# Allegro board arena_12-12_v6.brd
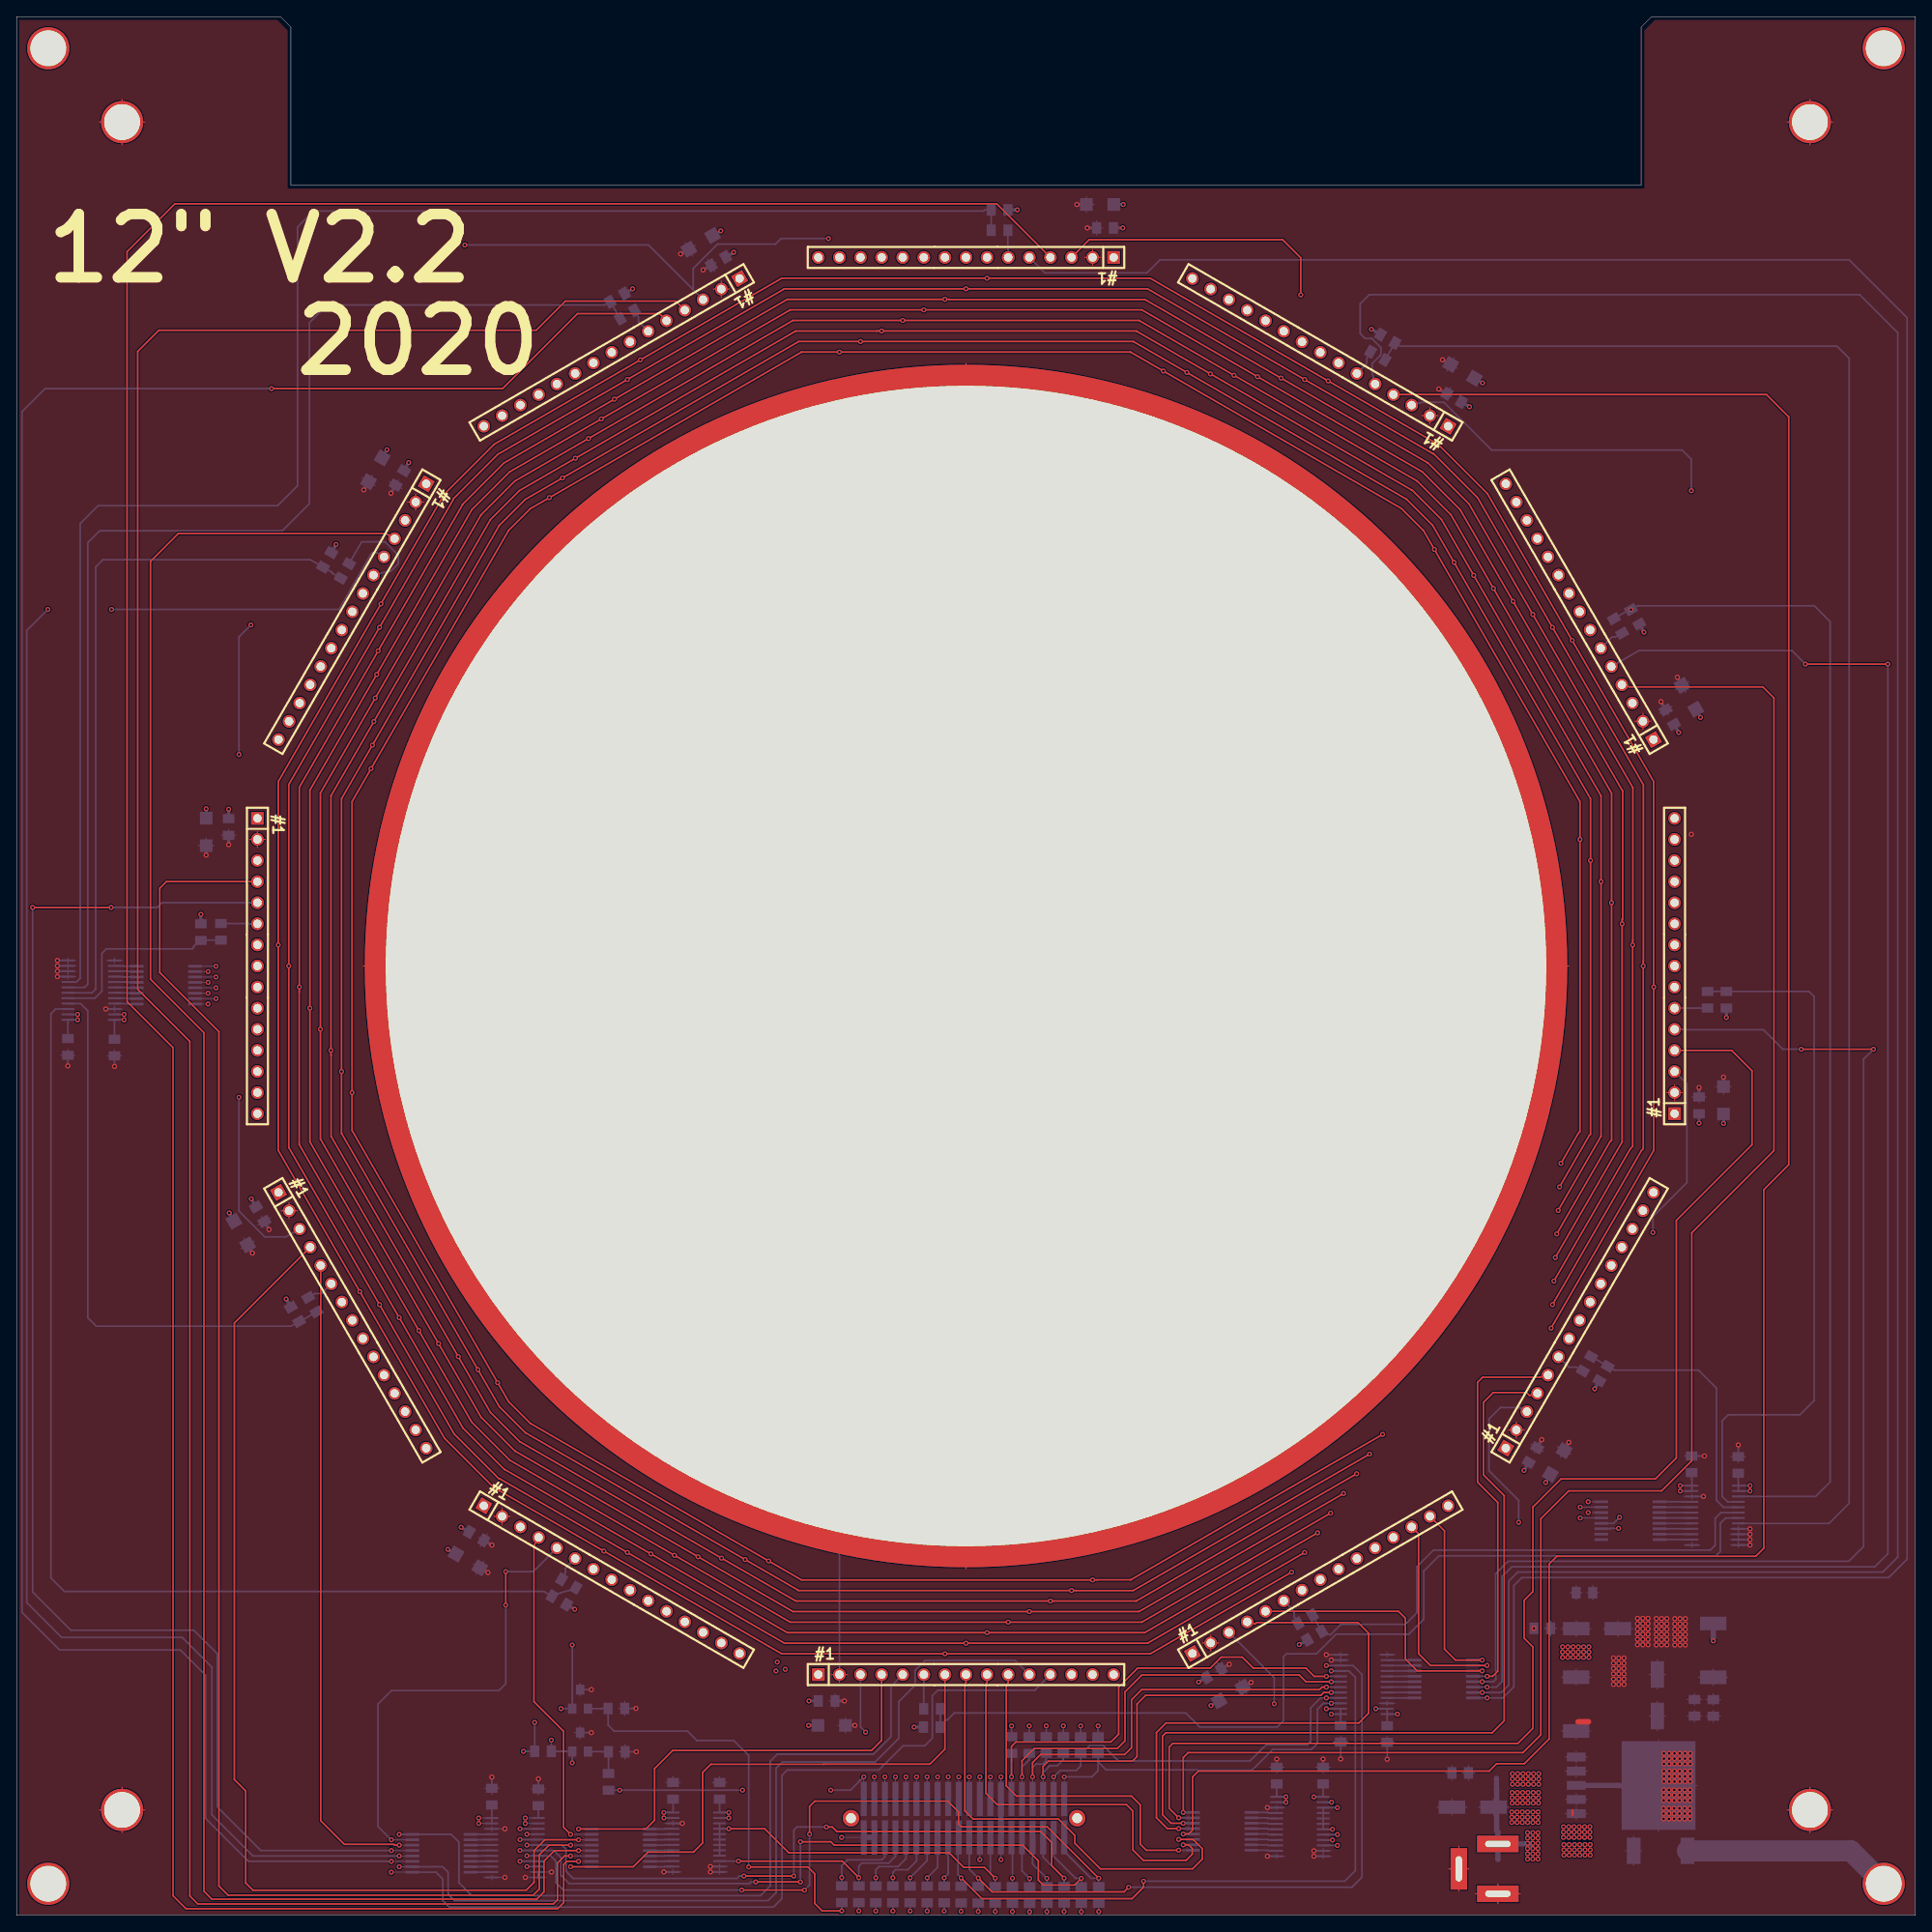
[diagram p0: board, top side]
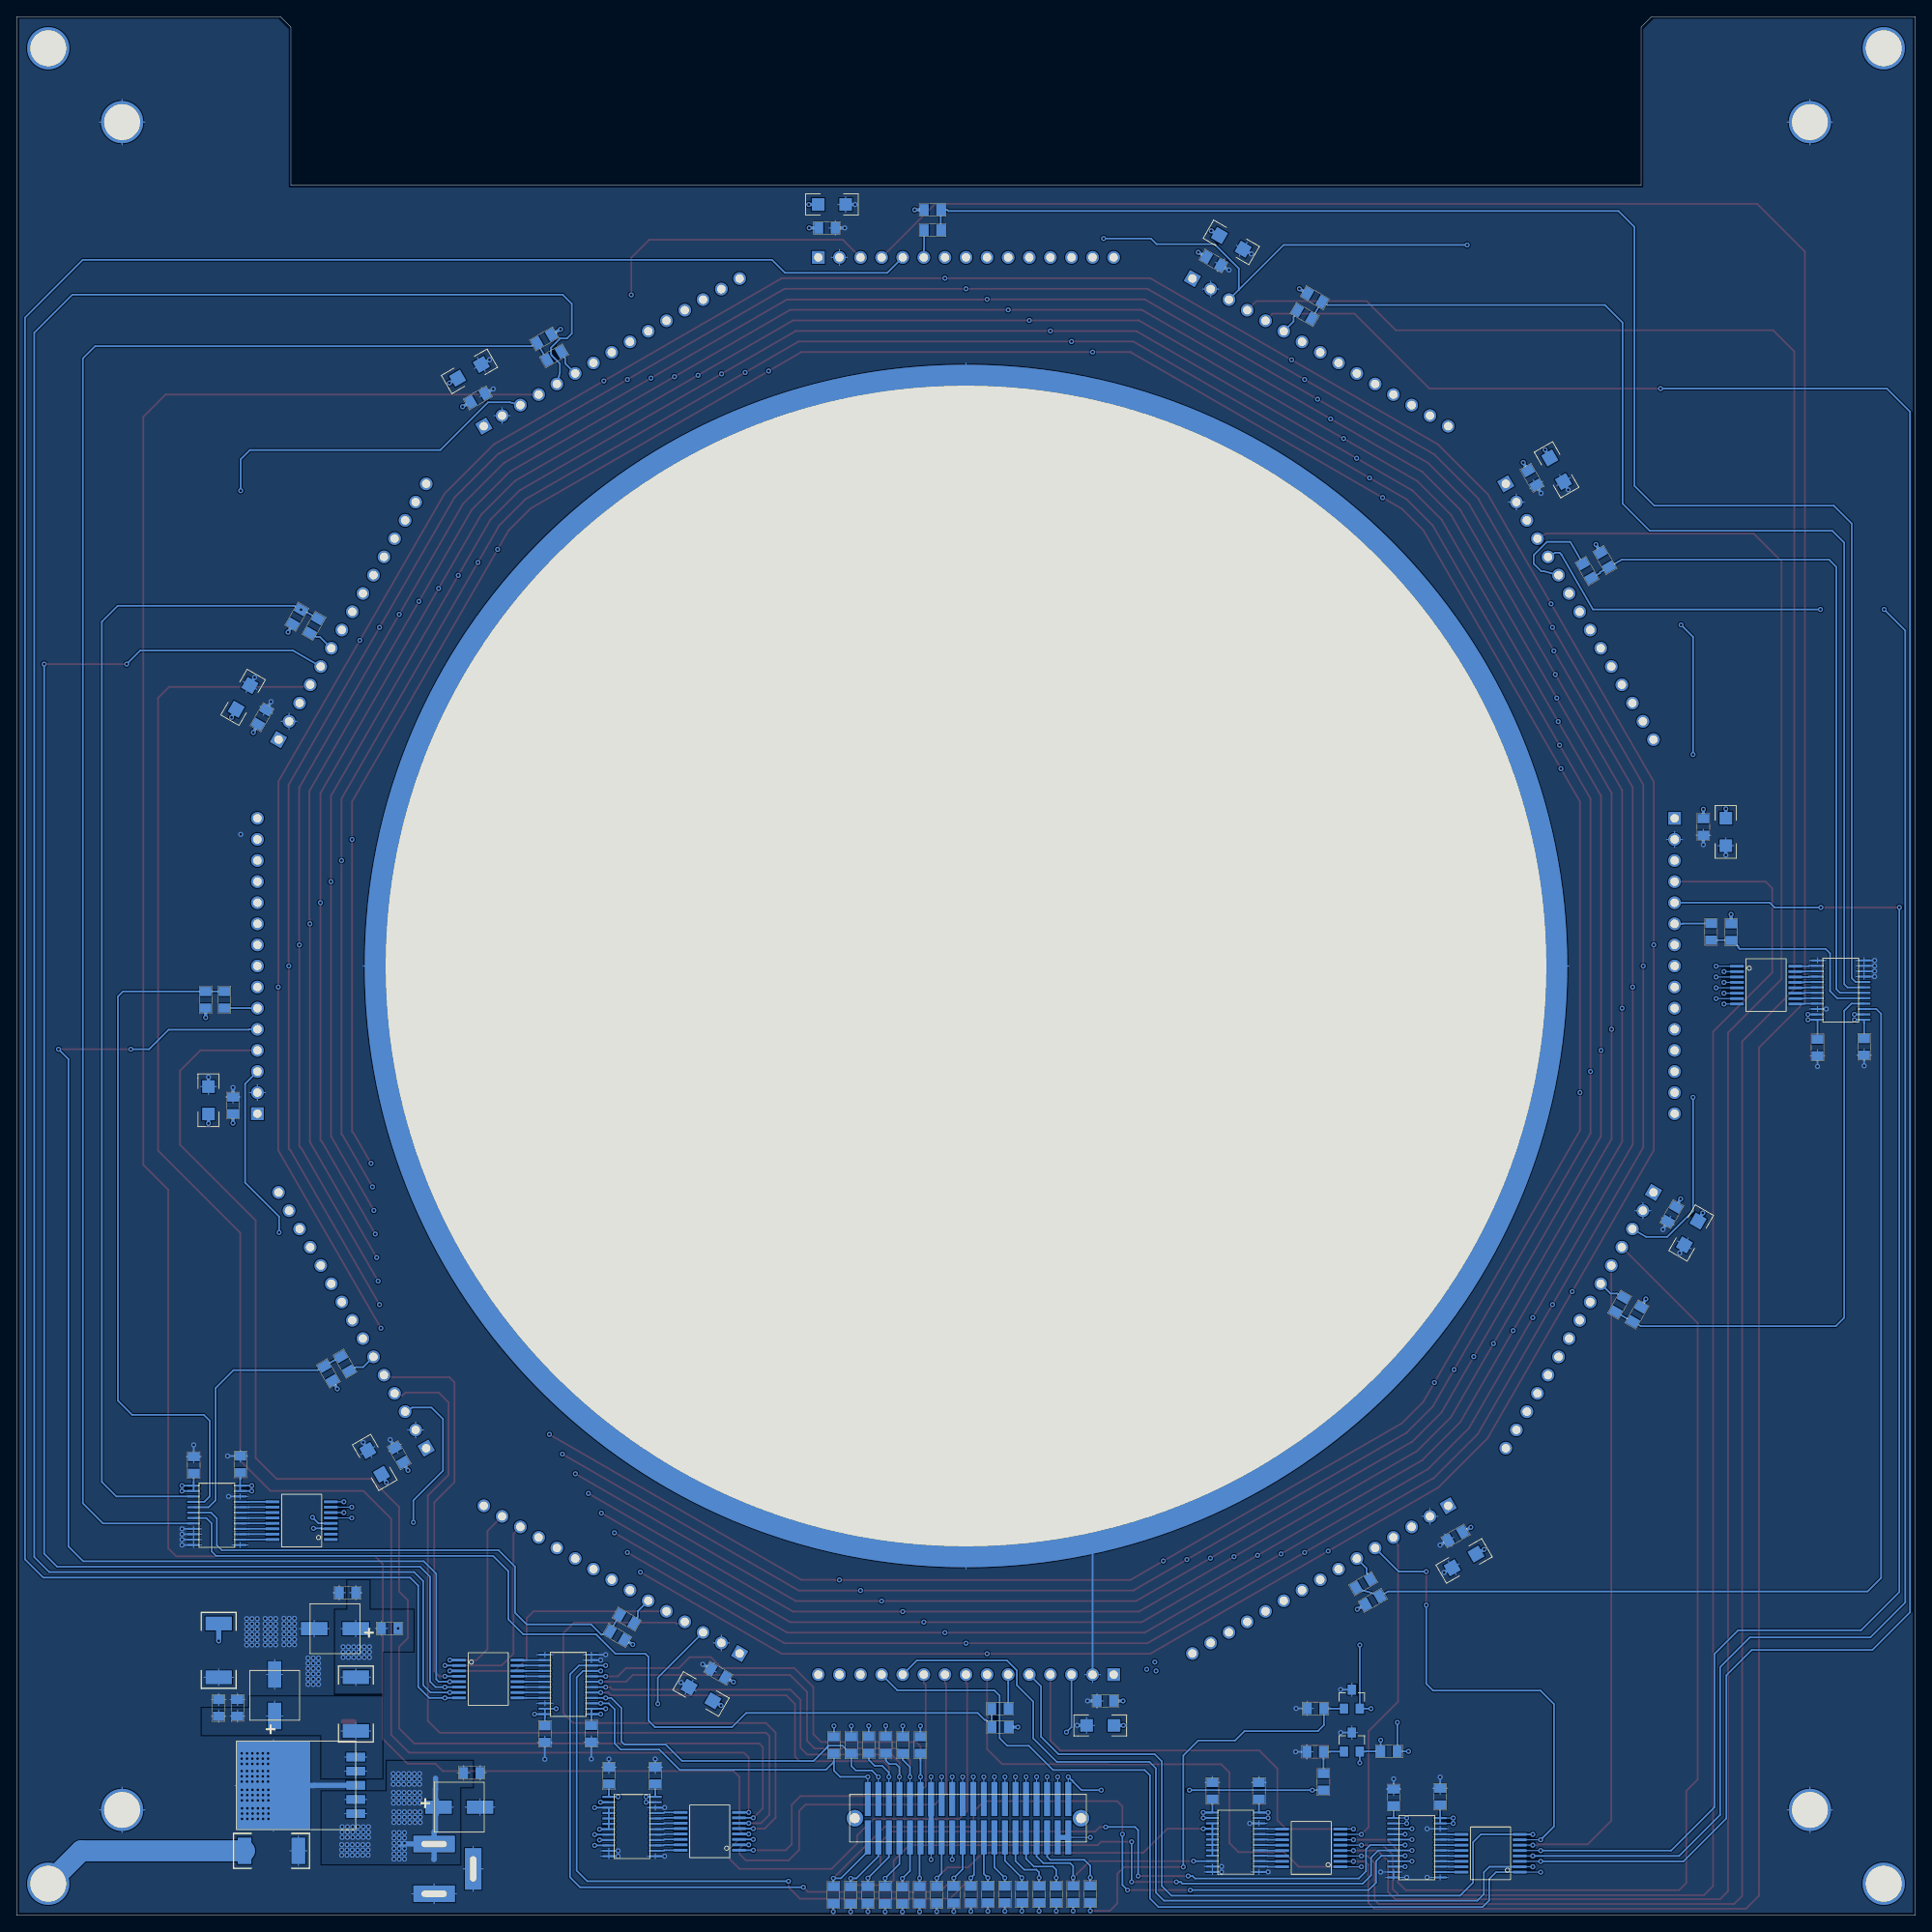
[diagram p1: board, bottom side, seen from below]

Outline 228.6 x 228.6 mm; copper layers: TOP, PWR, LAYER 1, GND2, LAYER 2, BOTTOM. Coordinates in mm from the lower left corner of the outline.
Outline path: 0,228.6 0,0 228.6,0 228.6,228.6 196.85,228.6 195.58,227.33 195.58,208.28 33.02,208.28 33.02,227.33 31.75,228.6 0,228.6

## Design rules (mm)
constraint set DEFAULT: min track width 0.127

## Placement (name value [footprint] x y rotation side)
C1  10uF  [1206]  82.36 201.42 210 bottom
C2  10uF  [1206]  130.44 205.98 180 bottom
C3  0.1uF  [EIA0805]  173.06 182.7 150 bottom
C4  10uF  [1206]  174.08 185.89 150 bottom
C5  0.1uF  [EIA0805]  131.04 203.16 180 bottom
C6  0.1uF  [EIA0805]  84.49 199.16 210 bottom
C7  0.1uF  [0805]  46.14 173.06 240 bottom
C8  10uF  [1206]  43.19 174.04 240 bottom
C9  10uF  [1206]  205.5 98.13 90 bottom
C10  0.1uF  [EIA0805]  202.55 97.52 90 bottom
C11  10uF  [1206]  22.82 130.44 270 bottom
C12  0.1uF  [EIA0805]  25.53 131.04 270 bottom
C13  10uF  [1206]  185.48 54.53 60 bottom
C14  0.1uF  [EIA0805]  182.55 55.42 60 bottom
C15  10uF  [1206]  54.33 42.67 330 bottom
C16  0.1uF  [EIA0805]  55.37 45.66 330 bottom
C17  10uF  [1206]  146.2 26.66 30 bottom
C18  0.1uF  [EIA0805]  144.14 29.16 30 bottom
C19  0.1uF  [EIA0805]  97.52 25.82 0 bottom
C20  10uF  [1206]  98.13 22.87 0 bottom
C21  10uF  [1206]  26.99 82.16 300 bottom
C22  0.1uF  [EIA0805]  29.32 84.42 300 bottom
C23  10uF  [1206]  201.33 146.65 120 bottom
C24  0.1uF  [EIA0805]  199.03 144.27 120 bottom
C25  0.1uF  [EIA0805]  62.81 14.21 90 bottom
C26  0.1uF  [EIA0805]  151.71 16.83 90 bottom
C27  0.1uF  [EIA0805]  157.29 16.83 90 bottom
C28  0.1uF  [EIA0805]  57.21 14.3 90 bottom
C29  0.1uF  [EIA0805]  11.79 104.48 270 bottom
C30  0.1uF  [EIA0805]  6.17 104.56 270 bottom
C31  0.1uF  [EIA0805]  159.41 21.87 270 bottom
C32  0.1uF  [EIA0805]  165.01 21.83 270 bottom
C33  0.1uF  [EIA0805]  84.63 15 90 bottom
C34  0.1uF  [EIA0805]  79.03 15 90 bottom
C35  0.1uF  [EIA0805]  201.66 54.31 90 bottom
C36  0.1uF  [EIA0805]  207.28 54.23 90 bottom
C37  0.1uF  [EIA0805]  173.8 17.16 180 bottom
C38  10uF  [AL_CAP_D]  177.81 13.03 180 bottom
C39  10uF/6.3/Elec  [AL_CAP_D]  197.54 24 90 bottom
C40  0.001uF/X5R  [EIA0805]  204.27 24.98 90 bottom
C41  0.1uF/X5R  [EIA0805]  202.01 24.99 90 bottom
C42  2.2uF/60/Elec  [AL_CAP_D]  187.77 34.52 0 bottom
C43  0.01uF/X5R  [EIA0805]  183.68 34.56 180 bottom
C44  0.1uF/X5R  [EIA0805]  188.76 38.85 0 bottom
J1  CONN15  [HDR-1X15]  56.25 49.31 330 top
J2  CONN15  [HDR-1X15]  179.29 56.25 60 top
J3  CONN15  [HDR-1X15]  197.07 141.56 120 top
J4  CONN15  [HDR-1X15]  96.52 28.99 0 top
J5  CONN15  [HDR-1X15]  28.99 132.08 270 top
J6  CONN15  [HDR-1X15]  87.04 197.07 210 top
J7  CONN15  [HDR-1X15]  172.35 179.29 150 top
J8  CONN15  [HDR-1X15]  141.56 31.53 30 top
J9  CONN15  [HDR-1X15]  199.61 96.52 90 top
J10  CONN15  [HDR-1X15]  31.53 87.04 300 top
J17  CONN15  [HDR-1X15]  49.31 172.35 240 top
J19  CONN15  [HDR-1X15]  132.08 199.61 180 top
J25  A35051-ND (68pin, 1.27mm pitch, Through hold, A113405-ND)  [SMV_2X20]  101.99 14.01 270 bottom
J26  CP-102A-ND  [PJ102A]  178.33 5.6 0 bottom
L1  Ferrite Bead/5-15Ohm  [EIA2512]  197.92 7.77 0 bottom
L2  Ferrite Bead/5-15Ohm  [EIA2512]  204.27 31.9 270 bottom
L3  Ferrite Bead/5-15Ohm  [EIA2512]  187.76 25.44 90 bottom
M1  TEST POINT  [8-32]  224.79 3.81 0 top
M2  TEST POINT  [8-32]  3.81 3.81 0 top
M3  TEST POINT  [8-32]  215.9 12.7 0 top
M4  TEST POINT  [8-32]  12.7 12.7 0 top
M5  TEST POINT  [8-32]  215.9 215.9 0 top
M6  TEST POINT  [8-32]  12.7 215.9 0 top
M7  TEST POINT  [8-32]  3.81 224.79 0 top
M8  TEST POINT  [8-32]  224.79 224.79 0 top
M9  TEST POINT  [1-32]  114.3 114.3 0 top
NOREF  -  []  0 228.6 0 top
NOREF#2  -  []  228.6 0 90 top
NOREF#3  -  []  135.59 180.83 0 top
Q1  MTD4P06  [SOT-23]  67.84 26.03 180 bottom
Q3  MTD4P06  [SOT-23]  67.84 20.87 180 bottom
R1  27  [EIA0805]  110.21 24.87 180 bottom
R2  27  [EIA0805]  66.47 39.95 150 bottom
R3  27  [EIA0805]  35.61 73.53 120 bottom
R4  27  [EIA0805]  24.6 118.41 90 bottom
R5  27  [EIA0805]  39.52 161.86 60 bottom
R6  27  [EIA0805]  73.53 192.74 30 bottom
R7  27  [EIA0805]  118.34 202.88 0 bottom
R8  27  [EIA0805]  163.88 187.76 150 bottom
R9  27  [EIA0805]  192.8 155.24 300 bottom
R10  27  [EIA0805]  203.58 110.24 270 bottom
R11  27  [EIA0805]  189.06 66.41 240 bottom
R12  27  [EIA0805]  155.14 35.66 210 bottom
R13  200  [EIA0805]  99.34 2.55 270 bottom
R14  20K  [EIA0805]  72.21 24.92 180 bottom
R17  200  [EIA0805]  71.26 16.08 90 bottom
R18  20K  [EIA0805]  72.26 19.7 180 bottom
R19  4.7K  [EIA0805]  117.82 2.48 270 bottom
R20  4.7K  [EIA0805]  63.37 19.75 0 bottom
R21  4.7K  [EIA0805]  111.67 2.51 270 bottom
R22  4.7K  [EIA0805]  109.63 2.51 270 bottom
R23  4.7K  [EIA0805]  119.79 20.51 90 bottom
R24  4.7K  [EIA0805]  121.91 20.51 90 bottom
R25  4.7K  [EIA0805]  126.11 2.48 270 bottom
R26  4.7K  [EIA0805]  124.04 2.45 270 bottom
R27  4.7K  [EIA0805]  121.96 2.44 270 bottom
R28  4.7K  [EIA0805]  119.89 2.46 270 bottom
R29  4.7K  [EIA0805]  115.77 2.49 270 bottom
R30  4.7K  [EIA0805]  113.72 2.5 270 bottom
R31  4.7K  [EIA0805]  130.28 2.46 270 bottom
R32  4.7K  [EIA0805]  128.18 2.45 270 bottom
R33  4.7K  [EIA0805]  123.96 20.52 90 bottom
R34  4.7K  [EIA0805]  126.02 20.52 90 bottom
R35  4.7K  [EIA0805]  128.1 20.51 90 bottom
R36  4.7K  [EIA0805]  130.2 20.51 90 bottom
R37  4.7K  [EIA0805]  165.07 189.81 150 bottom
R38  4.7K  [EIA0805]  118.34 205.33 0 bottom
R39  4.7K  [EIA0805]  72.31 194.77 30 bottom
R40  4.7K  [EIA0805]  37.39 163.19 60 bottom
R41  4.7K  [EIA0805]  22.19 118.38 90 bottom
R42  4.7K  [EIA0805]  33.52 72.36 120 bottom
R43  4.7K  [EIA0805]  65.34 37.92 330 bottom
R44  4.7K  [EIA0805]  110.19 22.67 180 bottom
R49  4.7K  [EIA0805]  156.27 33.68 210 bottom
R50  4.7K  [EIA0805]  191.06 65.24 240 bottom
R51  4.7K  [EIA0805]  205.84 110.24 270 bottom
R52  4.7K  [EIA0805]  194.86 156.34 300 bottom
R57  4.7K  [EIA0805]  107.57 2.53 270 bottom
R58  4.7K  [EIA0805]  105.5 2.53 270 bottom
R59  4.7K  [EIA0805]  103.44 2.53 270 bottom
R60  4.7K  [EIA0805]  101.4 2.54 270 bottom
RN1  20  [SSOP16]  51.14 7.48 0 bottom
RN2  20  [SSOP16]  72.73 8.13 0 bottom
RN3  20  [SSOP16]  17.97 112 180 bottom
RN4  20  [SSOP16]  171.82 28.46 180 bottom
RN5  20  [SSOP16]  145.15 10.12 0 bottom
RN6  20  [SSOP16]  194.28 47.52 0 bottom
U1  SN74LVC8T245  [TSSOP24]  62.81 11.72 180 bottom
U2  SN74LVC8T245  [TSSOP24]  6.18 107.82 0 bottom
U3  SN74LVC8T245  [TSSOP24]  84.63 12.38 180 bottom
U4  SN74LVC8T245  [TSSOP24]  159.4 24.23 0 bottom
U5  SN74LVC8T245  [TSSOP24]  157.3 14.27 180 bottom
U6  SN74LVC8T245  [TSSOP24]  207.29 51.74 180 bottom
U7  LT1764  [DD5]  187.77 12.26 0 bottom

## Library data of the parts
C1 C2 C4 C8 C9 C11 C13 C15 C17 C20 C21 C23 C38 = CAPACITOR POL
C3 C5-C7 C10 C12 C14 C16 C18 C19 C22 C24-C37 = CAPACITOR NON-POL
C39 C42 = CAPACITOR
C40 C41 C43 C44 = CAP NP
J1-J10 J17 J19 = CONN RECT 15_7
J25 = HEADER 34x2_1
J26 = HEADER 3
L1-L3 = BEADARR_4
M1-M9 = TEST POINT
Q1 Q3 = MTD4P06
R1-R14 R17-R44 R49-R52 R57-R60 = RESISTOR
RN1-RN6 = RESNW_IS_8
U1-U6 = SN7474LVC8T245
U7 = LT1764

## Footprints (pads in the part's own frame, mm; a bottom-side part is the same pattern mirrored in y, then rotated)
1-32
  round 144.78 hole 139.7: 1(0,0)
8-32
  round 5.08 hole 4.305: 1(0,0)
0805
  rect 1.1x1.4 smd: 1(-1.001,0) 2(1.001,0)
1206
  rect 1.524x1.524 smd: 1(-1.651,0) 2(1.651,0)
AL_CAP_D
  rect 3.2x1.6 smd: 1(0,0) 2(5.001,0)
DD5
  rect 2.286x1.067 smd: 1(0,0) 2(0,-1.702) 3(0,-3.404) 4(0,-5.105) 5(0,-6.807)
  rect 8.89x10.668 smd: 6(9.906,-3.378)
EIA0805
  rect 1.1x1.4 smd: 1(-1.001,0) 2(1.001,0)
EIA2512
  rect 1.651x3.175 smd: 1(-3.239,0) 2(3.239,0)
HDR-1X15
  rect 1.524x1.524 hole 1.016: 1(0,0)
  round 1.524 hole 1.016: 2(2.54,0) 3(5.08,0) 4(7.62,0) 5(10.16,0) 6(12.7,0) 7(15.24,0) 8(17.78,0) 9(20.32,0) 10(22.86,0) 11(25.4,0) 12(27.94,0) 13(30.48,0) 14(33.02,0) 15(35.56,0)
PJ102A
  rect 5.001x1.999 hole 3.051x0.759: 1(0,-3) 2(0,3)
  rect 1.999x5.001 hole 0.759x3.051: 3(-4.699,0)
SMV_2X20
  round 1.999 hole 1.191 unplated: (2.309,-25.69) (2.309,1.539)
  rect 4.11x0.729 smd: 1(0,0) 2(0,-1.27) 3(0,-2.54) 4(0,-3.81) 5(0,-5.08) 6(0,-6.35) 7(0,-7.62) 8(0,-8.89) 9(0,-10.16) 10(0,-11.43) 11(0,-12.7) 12(0,-13.97) 13(0,-15.24) 14(0,-16.51) 15(0,-17.78) 16(0,-19.05) 17(0,-20.32) 18(0,-21.59) 19(0,-22.86) 20(0,-24.13) 21(4.62,-24.13) 22(4.62,-22.86) 23(4.62,-21.59) 24(4.62,-20.32) 25(4.62,-19.05) 26(4.62,-17.78) 27(4.62,-16.51) 28(4.62,-15.24) 29(4.62,-13.97) 30(4.62,-12.7) 31(4.62,-11.43) 32(4.62,-10.16) 33(4.62,-8.89) 34(4.62,-7.62) 35(4.62,-6.35) 36(4.62,-5.08) 37(4.62,-3.81) 38(4.62,-2.54) 39(4.62,-1.27) 40(4.62,0)
SOT-23
  rect 1.016x1.219 smd: 1(-0.953,-1.143) 2(0.953,-1.143) 3(0,1.143)
SSOP16
  rect 1.651x0.33 smd: 1(-3.505,2.276) 2(-3.505,1.626) 3(-3.505,0.975) 4(-3.505,0.325) 5(-3.505,-0.325) 6(-3.505,-0.975) 7(-3.505,-1.626) 8(-3.505,-2.276) 9(3.505,-2.276) 10(3.505,-1.626) 11(3.505,-0.975) 12(3.505,-0.325) 13(3.505,0.325) 14(3.505,0.975) 15(3.505,1.626) 16(3.505,2.276)
TSSOP24
  rect 1.549x0.249 smd: 1(0,0) 2(0,-0.65) 3(0,-1.3) 4(0,-1.951) 5(0,-2.601) 6(0,-3.251) 7(0,-3.899) 8(0,-4.549) 9(0,-5.199) 10(0,-5.85) 11(0,-6.5) 12(0,-7.15) 13(5.601,-7.15) 14(5.601,-6.5) 15(5.601,-5.85) 16(5.601,-5.199) 17(5.601,-4.549) 18(5.601,-3.899) 19(5.601,-3.251) 20(5.601,-2.601) 21(5.601,-1.951) 22(5.601,-1.3) 23(5.601,-0.65) 24(5.601,0)

## Nets
3.3VDC: C25.1 C27.1 C29.1 C31.1 C33.1 C35.1 C42.1 C43.1 C44.1 L3.2 R19.2 R21.2 R22.2 R23.2 R24.2 R25.2 R26.2 R27.2 R28.2 R29.2 R30.2 R31.2 R32.2 R33.2 R34.2 R35.2 R36.2 R57.2 R58.2 R59.2 R60.2 U1.1 U1.2 U2.23 U2.24 U3.1 U3.2 U4.1 U4.2 U5.1 U5.2 U6.23 U6.24
5VDC: C1.1 C2.1 C3.1 C4.1 C5.1 C6.1 C7.1 C8.1 C9.1 C10.1 C11.1 C12.1 C13.1 C14.1 C15.1 C16.1 C17.1 C18.1 C19.1 C20.1 C21.1 C22.1 C23.1 C24.1 C26.1 C28.1 C30.1 C32.1 C34.1 C36.1 C37.1 C38.1 J1.1 J2.1 J3.1 J4.1 J5.1 J6.1 J7.1 J8.1 J9.1 J10.1 J17.1 J19.1 J26.1 R20.1 R37.2 R38.2 R39.2 R40.2 R41.2 R42.2 R43.2 R44.2 R49.2 R50.2 R51.2 R52.2 U1.23 U1.24 U2.1 U2.2 U3.23 U3.24 U4.23 U4.24 U5.23 U5.24 U6.1 U6.2 U7.1 U7.2
GND: C1.2 C2.2 C3.2 C4.2 C5.2 C6.2 C7.2 C8.2 C9.2 C10.2 C11.2 C12.2 C13.2 C14.2 C15.2 C16.2 C17.2 C18.2 C19.2 C20.2 C21.2 C22.2 C23.2 C24.2 C25.2 C26.2 C27.2 C28.2 C29.2 C30.2 C31.2 C32.2 C33.2 C34.2 C35.2 C36.2 C37.2 C38.2 C39.2 C40.2 C41.2 C42.2 C43.2 C44.2 J1.2 J2.2 J3.2 J4.2 J5.2 J6.2 J7.2 J8.2 J9.2 J10.2 J17.2 J19.2 J26.2 J26.3 L1.1 L2.2 M3.1 M4.1 M5.1 M6.1 M9.1 Q1.3(S) Q3.3(S) R14.1 R18.1 U1.11 U1.12 U1.13 U1.22(\\O\E\) U2.9 U2.10 U2.11 U2.12 U2.13 U2.22(\\O\E\) U3.11 U3.12 U3.13 U3.22(\\O\E\) U4.11 U4.12 U4.13 U4.22(\\O\E\) U5.11 U5.12 U5.13 U5.22(\\O\E\) U6.9 U6.10 U6.11 U6.12 U6.13 U6.22(\\O\E\) U7.3 U7.6
GND_SIGNAL: J25.14 J25.27 J25.29 J25.39 J25.40 L2.1
CS0: J1.7 J2.7 J3.7 J4.7 J5.7 J6.7 J7.7 J8.7 J9.7 J10.7 J17.7 J19.7 RN2.1
CS1: J1.8 J2.8 J3.8 J4.8 J5.8 J6.8 J7.8 J8.8 J9.8 J10.8 J17.8 J19.8 RN5.3
CS2: J1.9 J2.9 J3.9 J4.9 J5.9 J6.9 J7.9 J8.9 J9.9 J10.9 J17.9 J19.9 RN5.2
CS3: J1.10 J2.10 J3.10 J4.10 J5.10 J6.10 J7.10 J8.10 J9.10 J10.10 J17.10 J19.10 RN5.1
CS4: J1.11 J2.11 J3.11 J4.11 J5.11 J6.11 J7.11 J8.11 J9.11 J10.11 J17.11 J19.11 RN1.2
CS5: J1.12 J2.12 J3.12 J4.12 J5.12 J6.12 J7.12 J8.12 J9.12 J10.12 J17.12 J19.12 RN1.1
CS6: J1.13 J2.13 J3.13 J4.13 J5.13 J6.13 J7.13 J8.13 J9.13 J10.13 J17.13 J19.13 RN4.2
CS7: J1.14 J2.14 J3.14 J4.14 J5.14 J6.14 J7.14 J8.14 J9.14 J10.14 J17.14 J19.14 RN4.1
CS_IN_0: J25.37 R60.1 U3.10
CS_IN_1: J25.36 R59.1 U5.8
CS_IN_2: J25.35 R58.1 U5.9
CS_IN_3: J25.34 R57.1 U5.10
CS_IN_4: J25.33 R22.1 U1.9
CS_IN_5: J25.32 R21.1 U1.10
CS_IN_6: J25.31 R30.1 U4.9
CS_IN_7: J25.30 R29.1 U4.10
EXT_INT: J1.15 J2.15 J3.15 J4.15 J5.15 J6.15 J7.15 J8.15 J9.15 J10.15 J17.15 J19.15 Q3.2 R20.2
EXT_INT_IN: J25.1 R17.1
MISO_0: R1.1 R44.1 U6.7
MISO_1: R2.1 R43.1 U2.3
MISO_2: R3.1 R42.1 U2.4
MISO_3: R4.1 R41.1 U2.5
MISO_4: R5.1 R40.1 U2.6
MISO_5: R6.1 R39.1 U2.7
MISO_6: R7.1 R38.1 U2.8
MISO_7: R8.1 R37.1 U6.8
MISO_8: R9.1 R52.1 U6.3
MISO_9: R10.1 R51.1 U6.4
MISO_10: R11.1 R50.1 U6.5
MISO_11: R12.1 R49.1 U6.6
MISO_OUT_0: J25.13 RN6.4
MISO_OUT_1: J25.12 RN3.8
MISO_OUT_2: J25.11 RN3.7
MISO_OUT_3: J25.10 RN3.6
MISO_OUT_4: J25.9 RN3.5
MISO_OUT_5: J25.8 RN3.4
MISO_OUT_6: J25.7 RN3.3
MISO_OUT_7: J25.6 RN6.3
MISO_OUT_8: J25.5 RN6.8
MISO_OUT_9: J25.4 RN6.7
MISO_OUT_10: J25.3 RN6.6
MISO_OUT_11: J25.2 RN6.5
MOSI_0: J4.5 RN1.8
MOSI_1: J1.5 RN1.7
MOSI_2: J10.5 RN1.6
MOSI_3: J5.5 RN1.5
MOSI_4: J17.5 RN1.4
MOSI_5: J6.5 RN1.3
MOSI_6: J19.5 RN4.8
MOSI_7: J7.5 RN4.7
MOSI_8: J3.5 RN4.6
MOSI_9: J9.5 RN4.5
MOSI_10: J2.5 RN4.4
MOSI_11: J8.5 RN4.3
MOSI_IN_0: J25.26 R28.1 U1.3
MOSI_IN_1: J25.25 R27.1 U1.4
MOSI_IN_2: J25.24 R26.1 U1.5
MOSI_IN_3: J25.23 R25.1 U1.6
MOSI_IN_4: J25.22 R32.1 U1.7
MOSI_IN_5: J25.21 R31.1 U1.8
MOSI_IN_6: J25.20 R36.1 U4.3
MOSI_IN_7: J25.19 R35.1 U4.4
MOSI_IN_8: J25.18 R34.1 U4.5
MOSI_IN_9: J25.17 R33.1 U4.6
MOSI_IN_10: J25.16 R24.1 U4.7
MOSI_IN_11: J25.15 R23.1 U4.8
RESET: J1.3 J2.3 J3.3 J4.3 J5.3 J6.3 J7.3 J8.3 J9.3 J10.3 J17.3 J19.3 Q1.2
RESET_IN: J25.38 R13.1
SCK_0: J4.4 RN2.8
SCK_1: J1.4 RN2.7
SCK_2: J10.4 RN2.6
SCK_3: J5.4 RN2.5
SCK_4: J17.4 RN2.4
SCK_5: J6.4 RN2.3
SCK_6: J19.4 RN2.2
SCK_7: J7.4 RN5.4
SCK_8: J3.4 RN5.8
SCK_9: J9.4 RN5.7
SCK_10: J2.4 RN5.6
SCK_11: J8.4 RN5.5
SCK_IN_0: J25.28 R19.1 U3.3 U3.4 U3.5 U3.6 U3.7 U3.8 U3.9 U5.3 U5.4 U5.5 U5.6 U5.7
N00182: J4.6 R1.2
N04213: J1.6 R2.2
N04860: J10.6 R3.2
N05048: J5.6 R4.2
N06135: J17.6 R5.2
N06323: J6.6 R6.2
N06511: J19.6 R7.2
N06699: J7.6 R8.2
N07866: J3.6 R9.2
N08054: J9.6 R10.2
N08430: J8.6 R12.2
N65117: J2.6 R11.2
N65750: Q1.1 R13.2 R14.2
N124786: C39.1 C40.1 C41.1 L3.1 U7.4 U7.5(SENSE)
N207682: Q3.1 R17.2 R18.2
N248336: L1.2 M1.1 M2.1 M7.1 M8.1
N926808: RN3.9 U2.21
N926809: RN3.10 U2.20
N935118: RN2.9 U3.21
N935119: RN2.10 U3.20
N953908: RN1.9 U1.21
N953909: RN1.10 U1.20
N9268010: RN3.11 U2.19
N9268011: RN3.12 U2.18
N9268012: RN3.13 U2.17
N9268013: RN3.14 U2.16
N9268014: RN3.15 U2.15
N9268015: RN3.16 U2.14
N9351110: RN2.11 U3.19
N9351111: RN2.12 U3.18
N9351112: RN2.13 U3.17
N9351113: RN2.14 U3.16
N9351114: RN2.15 U3.15
N9351115: RN2.16 U3.14
N9539010: RN1.11 U1.19
N9539011: RN1.12 U1.18
N9539012: RN1.13 U1.17
N9539013: RN1.14 U1.16
N9539014: RN1.15 U1.15
N9539015: RN1.16 U1.14
N10228215: RN4.9 U4.21
N10228216: RN4.10 U4.20
N10228217: RN4.11 U4.19
N10228218: RN4.12 U4.18
N10228219: RN4.13 U4.17
N10228220: RN4.14 U4.16
N10228221: RN4.15 U4.15
N10228222: RN4.16 U4.14
N10904015: RN5.9 U5.21
N10904016: RN5.10 U5.20
N10904017: RN5.11 U5.19
N10904018: RN5.12 U5.18
N10904019: RN5.13 U5.17
N10904020: RN5.14 U5.16
N10904021: RN5.15 U5.15
N10904022: RN5.16 U5.14
N11250315: RN6.9 U6.21
N11250316: RN6.10 U6.20
N11250317: RN6.11 U6.19
N11250318: RN6.12 U6.18
N11250319: RN6.13 U6.17
N11250320: RN6.14 U6.16
N11250321: RN6.15 U6.15
N11250322: RN6.16 U6.14

Pads without a net: RN3 1 2; RN6 1 2

## Via types
v1: diameter 0.61, hole 0.33, TOP to BOTTOM, 668 vias

## Routing (per net, layer and track width the routed paths; a pad name or vN(x,y) marks a point on that pad's centre or on a via; arc(x,y) is an arc through that point)
3.3VDC: length 67.1
  BOTTOM w0.127: 183.95,34.56 C43.1 ; C43.1 184.68,35.44 ; C43.1 184.68,33.68 ; C43.1 185.41,34.56 ; C44.1 187.76,39.73 ; C44.1 187.76,37.97 ; C44.1 188.49,38.85 ; C44.1 187.03,38.85 ; U1.1 v1(61.24,11.72) ; C42.1 189.55,34.52 ; C42.1 185.99,34.52 ; C42.1 187.77,35.5 ; C42.1 187.77,33.54 ; L3.2 189.52,28.68 ; L3.2 185.99,28.68 ; L3.2 187.76,29.68 ; L3.2 187.76,27.67 ; U1.2 v1(61.24,11.07)
  BOTTOM w0.203: U4.1 159.4,23.88 159.41,23.87 C31.1 ; U4.1 U4.2 v1(157.69,24.88) ; U4.1 v1(158.28,24.23) ; C35.1 201.66,52.52 201.69,52.5 U6.24 ; U6.24 v1(200.29,51.74) ; U6.24 U6.23 v1(200.29,51.09) ; R32.2 v1(128.18,0.44) ; R25.2 v1(126.11,0.47) ; R19.2 v1(117.82,0.47) ; v1(85.74,12.38) U3.1 C33.1 ; R59.2 v1(103.44,0.52) ; v1(12.94,107.82) U2.24 C29.1 ; R60.2 v1(101.4,0.53) ; U1.1 C25.1 ; U2.23 v1(12.94,108.47) ; R30.2 v1(113.72,0.5) ; R27.2 v1(121.96,0.43) ; R21.2 v1(111.67,0.51) ; R26.2 v1(124.04,0.44) ; R36.2 v1(130.2,22.81) ; C27.1 157.29,14.64 157.3,14.63 U5.1 v1(156.18,14.27) ; R58.2 v1(105.5,0.52) ; R57.2 v1(107.57,0.52) ; R22.2 v1(109.63,0.51) ; U5.2 v1(158.3,13.62) ; U3.2 v1(85.74,11.73) ; R24.2 v1(121.91,22.81) ; R31.2 v1(130.28,0.46) ; R35.2 v1(128.1,22.81) ; R28.2 v1(119.89,0.46) ; R34.2 v1(126.02,22.82) ; R23.2 v1(119.79,22.81) ; R29.2 v1(115.77,0.48) ; R33.2 v1(123.96,22.82)
  vias: v1(186.12,32.33) v1(186.12,31.7) v1(186.12,31.06) v1(186.75,32.33) v1(186.75,31.7) v1(186.75,31.06) v1(187.39,32.33) v1(187.39,31.7) v1(187.39,31.06) v1(188.02,32.33) v1(188.02,31.7) v1(188.02,31.06) v1(188.66,32.33) v1(188.66,31.7) v1(188.66,31.06) v1(189.29,32.33) v1(189.29,31.7) v1(189.29,31.06)
5VDC: length 156.9
  PWR w0.127: 140.61,31.53 J8.1 ; J8.1 141.56,32.47 ; J8.1 142.5,31.53 ; J8.1 141.56,30.59 ; 199.61,95.58 J9.1 ; J9.1 200.55,96.52 ; J9.1 199.61,97.46 ; J9.1 198.67,96.52 ; J19.1 132.08,200.55 ; J19.1 131.14,199.61 ; J19.1 132.08,198.67 ; J19.1 133.02,199.61 ; 196.13,141.56 J3.1 ; J3.1 198.01,141.56 ; J3.1 197.07,142.5 ; J3.1 197.07,140.61 ; 48.37,172.35 J17.1 ; J17.1 50.25,172.35 ; J17.1 49.31,171.41 ; J17.1 49.31,173.29 ; J10.1 32.47,87.04 ; J10.1 31.53,87.99 ; J10.1 30.59,87.04 ; J10.1 31.53,86.1 ; J7.1 173.29,179.29 ; J7.1 172.35,180.23 ; J7.1 171.41,179.29 ; J7.1 172.35,178.35 ; 179.29,55.31 J2.1 ; J2.1 180.23,56.25 ; J2.1 179.29,57.19 ; J2.1 178.35,56.25 ; J5.1 28.99,133.02 ; J5.1 29.93,132.08 ; J5.1 28.05,132.08 ; J5.1 28.99,131.14 ; 95.58,28.99 J4.1 ; J4.1 96.52,28.05 ; J4.1 97.46,28.99 ; J4.1 96.52,29.93 ; J6.1 87.04,198.01 ; J6.1 87.04,196.13 ; J6.1 87.99,197.07 ; J6.1 86.1,197.07 ; J26.1 181.02,8.6 ; J26.1 178.33,7.42 ; J26.1 178.33,9.78 ; J26.1 175.65,8.6 ; 56.25,48.37 J1.1 ; J1.1 57.19,49.31 ; J1.1 55.31,49.31 ; J1.1 56.25,50.25
  BOTTOM w0.127: C37.1 175.53,17.16 ; C37.1 174.07,17.16 ; C37.1 174.8,18.04 ; C37.1 174.8,16.28 ; U1.23 v1(55.64,11.07) ; U7.2 187.77,14.67 ; U7.2 189.09,13.96 ; U7.2 187.77,13.24 ; U7.2 186.45,13.96 ; 176.03,13.03 C38.1 ; C38.1 177.81,12.05 ; C38.1 177.81,14.01 ; C38.1 179.59,13.03 ; 186.45,12.26 U7.1 ; U7.1 187.77,12.97 ; U7.1 187.77,11.54 ; U7.1 189.09,12.26 ; U1.24 v1(55.64,11.72)
  BOTTOM w0.203: C28.1 U1.24 U1.23 ; U2.2 v1(7.34,108.47) ; U4.24 v1(166.24,24.23) ; U4.24 165,23.88 165.01,23.87 C32.1 ; U4.24 U4.23 v1(163.64,24.88) ; U6.1 207.29,52.09 207.28,52.11 C36.1 ; U6.1 U6.2 v1(208.69,51.09) ; U6.1 v1(208.69,51.74) ; v1(61.02,19.75) R20.1 v1(62.37,23.23) ; v1(77.93,12.38) U3.24 C34.1 ; v1(7.34,107.82) U2.1 6.18,107.47 6.17,107.46 C30.1 ; C26.1 151.71,14.64 151.7,14.63 U5.24 v1(152.82,14.27) ; U5.23 v1(152.82,13.62) ; 164.09,190.39 164.17,190.31 R37.2 ; U3.23 v1(77.93,11.73)
  BOTTOM w0.381: C15.1 v1(51.92,44.07) ; C3.1 v1(174.91,181.63) ; C11.1 v1(22.82,133.23) ; R51.2 v1(205.84,108.1) ; R43.2 v1(67.19,36.85) ; C18.1 v1(142.3,28.09) ; C22.1 v1(28.26,86.27) ; C19.1 v1(95.39,25.82) ; C7.1 v1(47.21,174.91) ; R41.2 v1(22.19,120.51) ; R44.2 v1(108.05,22.67) ; 202.16,145.22 v1(202.73,144.23) ; C20.1 v1(95.35,22.87) ; C16.1 v1(53.52,46.73) ; C24.1 v1(200.1,142.42) ; R52.2 v1(195.92,154.49) ; C13.1 v1(184.09,52.12) ; R38.2 v1(120.47,205.33) ; R40.2 v1(38.46,165.04) ; C2.1 v1(133.23,205.98) ; R50.2 v1(189.99,63.39) ; C14.1 v1(181.48,53.57) ; C6.1 v1(86.34,200.23) ; 155.41,33.18 v1(154.42,32.61) ; C5.1 v1(133.17,203.16) ; R39.2 v1(74.16,195.83) ; 33.01,73.23 v1(32.45,74.21) ; 164.09,190.39 v1(163.11,190.96) ; C4.1 v1(176.49,184.5) ; C12.1 v1(25.53,133.17) ; C21.1 v1(25.6,84.57) ; C8.1 v1(44.59,176.45) ; C10.1 v1(202.55,95.39) ; C9.1 v1(205.5,95.35) ; C17.1 v1(143.79,25.27) ; C1.1 v1(84.77,202.81)
  BOTTOM w0.635: 178.17,16.51 178.17,15.19 178.18,15.18 178.18,10.2 178.33,10.05 J26.1 ; J26.1 182.39,8.6 182.46,8.67 ; J26.1 178.33,6.77 178.37,6.73
  vias: v1(91.42,29.43) v1(91.57,30.5) v1(92.54,29.63) v1(180.05,14.8) v1(180.05,14.16) v1(180.05,13.53) v1(180.01,12.46) v1(180.01,11.82) v1(180.01,11.19) v1(180.09,17.06) v1(180.09,16.42) v1(180.09,15.79) v1(180.64,12.46) v1(180.64,11.82) v1(180.64,11.19) v1(180.72,17.06) v1(180.72,16.42) v1(180.72,15.79) v1(180.68,14.8) v1(180.68,14.16) v1(180.68,13.53) v1(181.32,14.8) v1(181.32,14.16) v1(181.32,13.53) v1(181.28,12.46) v1(181.28,11.82) v1(181.28,11.19) v1(181.36,17.06) v1(181.36,16.42) v1(181.36,15.79) v1(181.91,12.46) v1(181.91,11.82) v1(181.91,11.19) v1(181.9,9.96) v1(181.9,9.32) v1(181.9,8.69) v1(181.9,8.05) v1(181.9,7.42) v1(181.9,6.78) v1(181.99,17.06) v1(181.99,16.42) v1(181.99,15.79) v1(181.95,14.8) v1(181.95,14.16) v1(181.95,13.53) v1(182.55,12.46) v1(182.55,11.82) v1(182.55,11.19) v1(182.54,9.96) v1(182.54,9.32) v1(182.54,8.69) v1(182.54,8.05) v1(182.54,7.42) v1(182.54,6.78) v1(182.63,17.06) v1(182.63,16.42) v1(182.63,15.79) v1(182.59,14.8) v1(182.59,14.16) v1(182.59,13.53) v1(183.22,14.8) v1(183.22,14.16) v1(183.22,13.53) v1(183.18,12.46) v1(183.18,11.82) v1(183.18,11.19) v1(183.17,9.96) v1(183.17,9.32) v1(183.17,8.69) v1(183.17,8.05) v1(183.17,7.42) v1(183.17,6.78) v1(183.26,17.06) v1(183.26,16.42) v1(183.26,15.79) v1(186.23,10.67) v1(186.23,10.03) v1(186.23,9.4) v1(186.28,8.52) v1(186.28,7.89) v1(186.28,7.25) v1(186.87,10.67) v1(186.87,10.03) v1(186.87,9.4) v1(186.92,8.52) v1(186.92,7.89) v1(186.92,7.25) v1(187.5,10.67) v1(187.5,10.03) v1(187.5,9.4) v1(187.55,8.52) v1(187.55,7.89) v1(187.55,7.25) v1(188.14,10.67) v1(188.14,10.03) v1(188.14,9.4) v1(188.19,8.52) v1(188.19,7.89) v1(188.19,7.25) v1(188.77,10.67) v1(188.77,10.03) v1(188.77,9.4) v1(188.82,8.52) v1(188.82,7.89) v1(188.82,7.25) v1(189.41,10.67) v1(189.41,10.03) v1(189.41,9.4) v1(189.46,8.52) v1(189.46,7.89) v1(189.46,7.25)
GND: length 1976.5
  TOP w0.127: 41.73,114.3 M9.1 ; M9.1 186.87,114.3 ; M9.1 114.3,41.73 ; M9.1 114.3,186.87 ; J7.2 171.09,180.56 ; J7.2 169.21,180.56 ; J7.2 170.15,179.62 ; J7.2 170.15,181.5 ; 84.84,194.86 J6.2 ; J6.2 85.79,195.8 ; J6.2 84.84,196.74 ; J6.2 83.9,195.8 ; M4.1 12.7,15.42 ; M4.1 9.98,12.7 ; M4.1 15.42,12.7 ; M4.1 12.7,9.98 ; M3.1 215.9,15.42 ; M3.1 218.62,12.7 ; M3.1 213.18,12.7 ; M3.1 215.9,9.98 ; J3.2 196.74,143.76 ; J3.2 195.8,142.81 ; J3.2 194.86,143.76 ; J3.2 195.8,144.7 ; J5.2 28.99,130.48 ; J5.2 29.93,129.54 ; J5.2 28.05,129.54 ; J5.2 28.99,128.6 ; 48.04,169.21 J17.2 ; J17.2 47.1,170.15 ; J17.2 48.98,170.15 ; J17.2 48.04,171.09 ; 180.56,57.51 J2.2 ; J2.2 181.5,58.45 ; J2.2 180.56,59.39 ; J2.2 179.62,58.45 ; 57.51,48.04 J1.2 ; J1.2 59.39,48.04 ; J1.2 58.45,47.1 ; J1.2 58.45,48.98 ; J26.3 174.82,5.6 ; J26.3 173.63,8.28 ; J26.3 172.45,5.6 ; J26.3 173.63,2.92 ; J26.2 181.02,2.6 ; J26.2 178.33,3.78 ; J26.2 175.65,2.6 ; J26.2 178.33,1.42 ; 213.18,215.9 M5.1 ; M5.1 218.62,215.9 ; M5.1 215.9,213.18 ; M5.1 215.9,218.62 ; 12.7,213.18 M6.1 ; M6.1 9.98,215.9 ; M6.1 15.42,215.9 ; M6.1 12.7,218.62 ; J10.2 33.74,84.84 ; J10.2 32.8,85.79 ; J10.2 32.8,83.9 ; J10.2 31.86,84.84 ; J4.2 99.06,29.93 ; J4.2 99.06,28.05 ; J4.2 100,28.99 ; J4.2 98.12,28.99 ; J8.2 144.7,32.8 ; J8.2 142.81,32.8 ; J8.2 143.76,33.74 ; J8.2 143.76,31.86 ; 129.54,198.67 J19.2 ; J19.2 130.48,199.61 ; J19.2 128.6,199.61 ; J19.2 129.54,200.55 ; 198.67,99.06 J9.2 ; J9.2 200.55,99.06 ; J9.2 199.61,100 ; J9.2 199.61,98.12
  TOP w0.203: 187.32,12.06 187.32,12.7
  TOP w0.635: 189.26,23.32 187.99,23.32
  LAYER 1 w0.127: J26.3 173.63,8.28 ; J26.3 172.45,5.6 ; J26.3 173.63,2.92 ; J26.3 174.82,5.6 ; M3.1 218.62,12.7 ; M3.1 213.18,12.7 ; M3.1 215.9,9.98 ; M3.1 215.9,15.42 ; J10.2 33.74,84.84 ; J10.2 31.86,84.84 ; J10.2 32.8,85.79 ; J10.2 32.8,83.9 ; M6.1 15.42,215.9 ; M6.1 9.98,215.9 ; M6.1 12.7,218.62 ; M6.1 12.7,213.18 ; J6.2 84.84,196.74 ; J6.2 85.79,195.8 ; J6.2 84.84,194.86 ; J6.2 83.9,195.8 ; 9.98,12.7 M4.1 ; M4.1 12.7,9.98 ; M4.1 15.42,12.7 ; M4.1 12.7,15.42 ; 169.21,180.56 J7.2 ; J7.2 171.09,180.56 ; J7.2 170.15,181.5 ; J7.2 170.15,179.62 ; J19.2 130.48,199.61 ; J19.2 129.54,198.67 ; J19.2 129.54,200.55 ; J19.2 128.6,199.61 ; M9.1 186.87,114.3 ; M9.1 114.3,41.73 ; M9.1 114.3,186.87 ; M9.1 41.73,114.3 ; 58.45,47.1 J1.2 ; J1.2 59.39,48.04 ; J1.2 58.45,48.98 ; J1.2 57.51,48.04 ; 178.33,1.42 J26.2 ; J26.2 181.02,2.6 ; J26.2 175.65,2.6 ; J26.2 178.33,3.78 ; J17.2 48.98,170.15 ; J17.2 47.1,170.15 ; J17.2 48.04,169.21 ; J17.2 48.04,171.09 ; J9.2 200.55,99.06 ; J9.2 198.67,99.06 ; J9.2 199.61,98.12 ; J9.2 199.61,100 ; J3.2 195.8,144.7 ; J3.2 194.86,143.76 ; J3.2 196.74,143.76 ; J3.2 195.8,142.81 ; J5.2 29.93,129.54 ; J5.2 28.99,130.48 ; J5.2 28.99,128.6 ; J5.2 28.05,129.54 ; J2.2 181.5,58.45 ; J2.2 180.56,59.39 ; J2.2 179.62,58.45 ; J2.2 180.56,57.51 ; 99.06,28.05 J4.2 ; J4.2 100,28.99 ; J4.2 98.12,28.99 ; J4.2 99.06,29.93 ; M5.1 218.62,215.9 ; M5.1 215.9,218.62 ; M5.1 213.18,215.9 ; M5.1 215.9,213.18 ; 143.76,31.86 J8.2 ; J8.2 142.81,32.8 ; J8.2 143.76,33.74 ; J8.2 144.7,32.8
  LAYER 2 w0.127: M4.1 12.7,15.42 ; M4.1 12.7,9.98 ; M4.1 9.98,12.7 ; M4.1 15.42,12.7 ; 12.7,213.18 M6.1 ; M6.1 15.42,215.9 ; M6.1 12.7,218.62 ; M6.1 9.98,215.9 ; 47.1,170.15 J17.2 ; J17.2 48.98,170.15 ; J17.2 48.04,169.21 ; J17.2 48.04,171.09 ; 180.56,57.51 J2.2 ; J2.2 181.5,58.45 ; J2.2 179.62,58.45 ; J2.2 180.56,59.39 ; J26.3 173.63,8.28 ; J26.3 172.45,5.6 ; J26.3 174.82,5.6 ; J26.3 173.63,2.92 ; 213.18,12.7 M3.1 ; M3.1 218.62,12.7 ; M3.1 215.9,9.98 ; M3.1 215.9,15.42 ; 175.65,2.6 J26.2 ; J26.2 181.02,2.6 ; J26.2 178.33,1.42 ; J26.2 178.33,3.78 ; M5.1 218.62,215.9 ; M5.1 213.18,215.9 ; M5.1 215.9,213.18 ; M5.1 215.9,218.62 ; 198.67,99.06 J9.2 ; J9.2 199.61,98.12 ; J9.2 199.61,100 ; J9.2 200.55,99.06 ; 194.86,143.76 J3.2 ; J3.2 196.74,143.76 ; J3.2 195.8,144.7 ; J3.2 195.8,142.81 ; J10.2 32.8,85.79 ; J10.2 33.74,84.84 ; J10.2 31.86,84.84 ; J10.2 32.8,83.9 ; 98.12,28.99 J4.2 ; J4.2 100,28.99 ; J4.2 99.06,28.05 ; J4.2 99.06,29.93 ; J1.2 58.45,48.98 ; J1.2 57.51,48.04 ; J1.2 58.45,47.1 ; J1.2 59.39,48.04 ; 41.73,114.3 M9.1 ; M9.1 114.3,186.87 ; M9.1 114.3,41.73 ; M9.1 186.87,114.3 ; J5.2 29.93,129.54 ; J5.2 28.99,128.6 ; J5.2 28.99,130.48 ; J5.2 28.05,129.54 ; J7.2 171.09,180.56 ; J7.2 169.21,180.56 ; J7.2 170.15,179.62 ; J7.2 170.15,181.5 ; J8.2 143.76,33.74 ; J8.2 142.81,32.8 ; J8.2 143.76,31.86 ; J8.2 144.7,32.8 ; 83.9,195.8 J6.2 ; J6.2 84.84,196.74 ; J6.2 85.79,195.8 ; J6.2 84.84,194.86 ; J19.2 130.48,199.61 ; J19.2 128.6,199.61 ; J19.2 129.54,200.55 ; J19.2 129.54,198.67
  BOTTOM w0.127: 78.08,11.08 U3.22 ; U3.22 79.03,10.78 ; U3.22 79.03,11.39 ; 178.33,1.42 J26.2 ; J26.2 175.65,2.6 ; J26.2 181.02,2.6 ; J26.2 178.33,3.78 ; 56.26,10.42 U1.22 ; U1.22 v1(58.79,10.42) ; U1.22 57.21,10.73 ; U1.22 57.21,10.12 ; 6.18,114.67 U2.12 ; U2.12 7.14,114.97 ; U2.12 6.18,115.28 ; C12.2 25.53,130.77 ; C12.2 26.41,130.04 ; C12.2 24.65,130.04 ; 55.29,41.03 C15.2 ; C15.2 54.95,42.32 ; C15.2 56.58,41.37 ; C15.2 56.23,42.66 ; 156.41,17.83 C27.2 ; C27.2 157.29,17.1 ; C27.2 158.17,17.83 ; 206.33,45.24 U6.11 ; U6.11 207.29,44.94 ; U6.11 207.29,45.54 ; 9.98,215.9 M6.1 ; M6.1 12.7,218.62 ; M6.1 12.7,213.18 ; M6.1 15.42,215.9 ; Q3.3 67.84,22.8 ; Q3.3 67.16,22.01 ; Q3.3 67.84,21.22 ; 172.18,185.9 172.65,186.72 ; 172.65,186.72 171.83,187.19 ; 172.65,186.72 173.12,187.53 ; 172.65,186.72 173.46,186.24 ; U2.11 7.14,114.32 ; U2.11 6.18,114.02 ; U2.11 6.18,114.63 ; 97.79,25.82 C19.2 ; C19.2 98.52,24.94 ; C19.2 98.52,26.7 ; 164.04,25.53 U4.22 ; U4.22 165.95,25.53 ; U4.22 165,25.84 ; U4.22 165,25.23 ; 99.06,28.05 J4.2 ; J4.2 98.12,28.99 ; J4.2 100,28.99 ; 172.07,17.16 C37.2 ; C37.2 172.8,16.28 ; C37.2 172.8,18.04 ; U1.13 57.21,4.88 ; U1.13 56.26,4.57 ; U1.13 v1(58.79,4.57) ; U1.13 57.21,4.27 ; J8.2 144.7,32.8 ; J8.2 143.76,31.86 ; J8.2 142.81,32.8 ; J8.2 143.76,33.74 ; 200.04,148.89 C23.2 ; C23.2 201.32,148.55 ; C23.2 199.69,147.61 ; C23.2 200.98,147.26 ; U2.22 11.79,109.43 ; U2.22 11.79,108.82 ; U2.22 12.74,109.12 ; 182.68,55.66 183.05,56.29 ; 183.05,56.29 183.81,55.85 ; 183.05,56.29 182.29,56.73 ; 183.05,56.29 183.42,56.92 ; C6.2 84.07,197.9 ; C6.2 83.19,199.43 ; C6.2 82.99,198.3 ; C6.2 84.26,199.03 ; L2.2 204.27,29.67 ; L2.2 202.5,28.66 ; L2.2 206.03,28.66 ; L2.2 204.27,27.66 ; 10.83,114.97 U2.13 ; U2.13 11.79,115.28 ; U2.13 11.79,114.67 ; U2.13 12.74,114.97 ; U3.13 79.03,5.54 ; U3.13 79.99,5.23 ; U3.13 79.03,4.93 ; C22.2 30.59,83.99 ; C22.2 29.06,83.11 ; C22.2 30.19,82.92 ; C22.2 29.46,84.18 ; J7.2 171.09,180.56 ; J7.2 169.21,180.56 ; J7.2 170.15,179.62 ; J7.2 170.15,181.5 ; C9.2 206.44,99.78 ; C9.2 204.56,99.78 ; C9.2 205.5,98.84 ; 144.38,29.29 C18.2 ; C18.2 145.64,30.03 ; C18.2 145.45,28.9 ; C18.2 144.57,30.42 ; U4.12 160.35,31.38 ; U4.12 159.4,31.69 ; U4.12 159.4,31.08 ; U3.11 85.59,5.88 ; U3.11 84.63,5.58 ; U3.11 84.63,6.19 ; M9.1 186.87,114.3 ; M9.1 114.3,41.73 ; M9.1 114.3,186.87 ; M9.1 41.73,114.3 ; C40.2 204.27,26.71 ; C40.2 205.15,25.98 ; C40.2 203.39,25.98 ; C40.2 204.27,25.25 ; U2.9 7.14,113.02 ; U2.9 6.18,112.72 ; U2.9 6.18,113.33 ; J26.3 174.82,5.6 ; J26.3 173.63,2.92 ; J26.3 173.63,8.28 ; J26.3 172.45,5.6 ; U1.12 63.77,4.57 ; U1.12 62.81,4.27 ; U1.12 v1(61.24,4.57) ; 67.84,27.97 Q1.3 67.84,26.39 ; 180.56,57.51 J2.2 ; J2.2 179.62,58.45 ; J2.2 180.56,59.39 ; J2.2 181.5,58.45 ; 129.54,198.67 J19.2 ; J19.2 128.6,199.61 ; J19.2 129.54,200.55 ; J19.2 130.48,199.61 ; 58.45,47.1 J1.2 ; J1.2 58.45,48.98 ; J1.2 57.51,48.04 ; J1.2 59.39,48.04 ; J6.2 85.79,195.8 ; J6.2 83.9,195.8 ; J6.2 84.84,194.86 ; J6.2 84.84,196.74 ; C30.2 7.05,103.56 ; C30.2 6.17,104.29 ; C30.2 5.29,103.56 ; M4.1 12.7,15.42 ; M4.1 12.7,9.98 ; M4.1 9.98,12.7 ; M4.1 15.42,12.7 ; C38.2 172.81,14.01 ; C38.2 172.81,12.05 ; C38.2 171.03,13.03 ; C38.2 174.59,13.03 ; 45.27,171.56 C7.2 ; C7.2 44.87,172.64 ; C7.2 46,172.83 ; C7.2 46.4,171.75 ; 165,31.08 U4.13 ; U4.13 164.04,31.38 ; U4.13 165,31.69 ; U4.13 165.95,31.38 ; C31.2 159.41,21.6 ; C31.2 160.29,20.87 ; C31.2 158.53,20.87 ; C34.2 79.03,16.73 ; C34.2 78.15,16 ; C34.2 79.91,16 ; 200.78,55.31 C35.2 ; C35.2 201.66,54.57 ; C35.2 201.66,56.04 ; 28.99,128.6 J5.2 ; J5.2 28.05,129.54 ; J5.2 28.99,130.48 ; J5.2 29.93,129.54 ; 201.12,25.99 C41.2 ; C41.2 202.01,26.73 ; C41.2 202.89,25.99 ; C41.2 202.01,25.26 ; 207.29,44.28 U6.12 ; U6.12 206.33,44.59 ; U6.12 207.29,44.89 ; U6.9 207.29,46.85 ; U6.9 207.29,46.24 ; U6.9 206.33,46.54 ; U5.22 151.7,13.28 ; U5.22 151.7,12.67 ; U5.22 152.66,12.97 ; J10.2 33.74,84.84 ; J10.2 31.86,84.84 ; J10.2 32.8,85.79 ; J10.2 32.8,83.9 ; C8.2 43.18,172.14 ; C8.2 41.89,171.8 ; C8.2 42.84,173.43 ; C8.2 41.55,173.08 ; C28.2 58.09,15.3 ; C28.2 57.21,14.57 ; C28.2 56.33,15.3 ; 201.67,98.52 C10.2 ; C10.2 202.55,97.79 ; C10.2 203.43,98.52 ; 157.3,7.47 U5.11 ; U5.11 157.3,8.08 ; U5.11 158.26,7.77 ; C1.2 81.4,199.78 ; C1.2 80.46,201.41 ; C1.2 80.11,200.13 ; C1.2 81.74,201.07 ; 99.78,21.93 C20.2 ; C20.2 98.84,22.87 ; C20.2 99.78,23.82 ; U1.11 v1(64.39,5.22) ; U1.11 61.86,5.22 ; U1.11 62.81,5.53 ; C44.2 189.76,39.73 ; C44.2 190.49,38.85 ; C44.2 189.03,38.85 ; C44.2 189.76,37.97 ; 215.9,213.18 M5.1 ; M5.1 213.18,215.9 ; M5.1 215.9,218.62 ; M5.1 218.62,215.9 ; C21.2 28.63,81.2 ; C21.2 27,80.26 ; C21.2 28.28,79.91 ; C21.2 27.34,81.54 ; 207.28,54.5 C36.2 ; C36.2 208.16,55.23 ; C36.2 206.4,55.23 ; 72.48,24.92 R14.1 ; R14.1 73.21,24.04 ; R14.1 73.21,25.8 ; U3.12 84.63,5.54 ; U3.12 85.59,5.23 ; U3.12 84.63,4.93 ; 150.83,17.83 C26.2 ; C26.2 151.71,17.1 ; C26.2 152.6,17.83 ; 48.04,169.21 J17.2 ; J17.2 48.04,171.09 ; J17.2 47.1,170.15 ; J17.2 48.98,170.15 ; C2.2 128.79,206.92 ; C2.2 128.79,205.04 ; C2.2 129.73,205.98 ; C5.2 130.04,204.04 ; C5.2 130.04,202.28 ; C5.2 130.77,203.16 ; C39.2 197.54,30.78 ; C39.2 196.56,29 ; C39.2 197.54,27.22 ; C39.2 198.52,29 ; C3.2 172.83,182.84 ; C3.2 172.64,183.97 ; C3.2 171.56,183.57 ; 195.8,142.81 J3.2 ; J3.2 196.74,143.76 ; J3.2 194.86,143.76 ; J3.2 195.8,144.7 ; 157.3,6.82 U5.12 ; U5.12 157.3,7.43 ; U5.12 158.26,7.12 ; 62.81,14.48 C25.2 ; C25.2 61.93,15.21 ; C25.2 63.7,15.21 ; 83.75,16 C33.2 ; C33.2 85.51,16 ; C33.2 84.63,16.73 ; 185.84,55.15 C13.2 ; C13.2 187.12,55.49 ; C13.2 186.78,56.78 ; C13.2 185.49,56.44 ; C42.2 194.55,34.52 ; C42.2 190.99,34.52 ; C42.2 192.77,33.54 ; C42.2 192.77,35.5 ; C29.2 12.67,103.48 ; C29.2 10.9,103.48 ; C29.2 11.79,104.21 ; C32.2 165.01,21.56 ; C32.2 165.89,20.83 ; C32.2 164.13,20.83 ; U7.6 197.68,21.15 ; U7.6 197.68,10.12 ; U7.6 202.3,15.63 ; 200.73,44.59 U6.13 ; U6.13 202.64,44.59 ; U6.13 201.69,44.28 ; U6.13 201.69,44.89 ; U4.11 160.35,30.73 ; U4.11 159.4,31.04 ; U4.11 159.4,30.43 ; C17.2 148.1,26.67 ; C17.2 148.45,27.95 ; C17.2 147.16,28.3 ; C17.2 146.82,27.01 ; 207.29,45.59 U6.10 ; U6.10 207.29,46.19 ; U6.10 206.33,45.89 ; 198.17,145.77 C24.2 ; C24.2 198.9,144.51 ; C24.2 199.3,145.58 ; C24.2 197.77,144.7 ; U2.10 6.18,113.98 ; U2.10 7.14,113.67 ; U2.10 6.18,113.37 ; 73.26,18.82 R18.1 ; R18.1 72.53,19.7 ; R18.1 73.26,20.58 ; 21.88,128.79 C11.2 ; C11.2 22.82,129.73 ; C11.2 23.76,128.79 ; 201.69,50.13 U6.22 ; U6.22 200.73,50.44 ; U6.22 201.69,50.74 ; 215.9,9.98 M3.1 ; M3.1 215.9,15.42 ; M3.1 218.62,12.7 ; M3.1 213.18,12.7 ; 193.67,7.77 L1.1 ; L1.1 194.68,6 ; L1.1 194.68,9.54 ; L1.1 195.68,7.77 ; 55.8,44.39 C16.2 ; C16.2 55.61,45.52 ; C16.2 56.68,45.92 ; C16.2 56.87,44.79 ; 151.7,6.82 U5.13 ; U5.13 152.66,7.12 ; U5.13 151.7,7.43 ; 198.67,99.06 J9.2 ; J9.2 199.61,98.12 ; J9.2 200.55,99.06 ; J9.2 199.61,100
  BOTTOM w0.203: C32.2 v1(165.01,18.8) ; U2.22 v1(10.74,109.12) ; U2.9 v1(4.91,113.02) ; C30.2 v1(6.17,102.29) ; U2.12 v1(4.91,114.97) ; U1.11 U1.12 ; C25.2 v1(62.81,16.43) ; Q3.3 v1(69.19,22.01) ; U5.11 v1(156.18,7.77) ; U3.11 v1(83.53,5.88) ; U3.22 v1(80.14,11.08) ; U4.12 v1(157.69,31.38) ; U6.11 v1(208.69,45.24) ; U2.11 v1(4.91,114.32) ; C35.2 v1(203.2,55.31) ; U6.12 v1(208.69,44.59) ; U6.9 v1(208.69,46.54) ; U2.10 v1(4.91,113.67) ; U4.11 v1(158.28,30.73) ; R14.1 v1(74.56,24.92) ; U5.13 v1(150.58,7.12) ; U6.10 v1(208.69,45.89) ; C27.2 v1(157.29,18.82) ; C31.2 v1(159.41,18.83) ; U5.22 v1(150.58,12.97) ; C28.2 v1(57.21,16.65) ; M9.1 99.06,99.06 J4.2 ; R18.1 v1(74.61,19.7) ; U3.13 v1(77.93,5.23) ; U5.12 v1(156.18,7.12) ; C29.2 v1(11.79,102.21) ; C36.2 v1(207.28,56.64) ; Q1.3 v1(69.19,27.18) ; C26.2 v1(151.71,18.82) ; U6.22 v1(203.09,50.44) ; U3.12 v1(83.53,5.23)
  BOTTOM w0.381: C8.2 v1(41.8,171.63) ; C7.2 v1(45.07,171.21) ; C17.2 v1(148.62,28.05) ; C12.2 v1(25.53,128.9) ; C15.2 v1(56.74,41.28) ; C5.2 v1(128.9,203.16) ; C2.2 v1(127.66,205.98) ; C23.2 v1(199.94,149.06) ; C20.2 v1(100.92,22.87) ; C13.2 v1(186.88,56.95) ; C10.2 v1(202.55,99.66) ; C16.2 v1(57.22,44.59) ; C6.2 v1(82.64,198.09) ; 183.05,56.29 v1(183.62,57.27) ; C3.2 v1(171.21,183.77) ; C22.2 v1(30.39,82.57) ; C21.2 v1(28.38,79.74) ; C18.2 v1(145.99,30.23) ; C1.2 v1(79.95,200.03) ; 172.65,186.72 v1(171.67,187.28) ; C11.2 v1(22.82,127.66) ; C9.2 v1(205.5,100.92) ; C19.2 v1(99.66,25.82) ; C24.2 v1(197.97,146.12)
  BOTTOM w0.635: U7.3 192.76,15.66 192.78,15.63 U7.6
  vias: v1(182.68,34.56) v1(192.25,30.99) v1(192.25,30.35) v1(192.25,29.72) v1(192.25,29.08) v1(192.25,28.45) v1(192.25,27.81) v1(192.89,30.99) v1(192.89,30.35) v1(192.89,29.72) v1(192.89,29.08) v1(192.89,28.45) v1(192.89,27.81) v1(193.52,30.99) v1(193.52,30.35) v1(193.52,29.72) v1(193.52,29.08) v1(193.52,28.45) v1(193.52,27.81) v1(195.15,35.76) v1(195.15,35.13) v1(195.15,34.49) v1(195.15,33.86) v1(195.15,33.22) v1(195.15,32.59) v1(195.78,35.76) v1(195.78,35.13) v1(195.78,34.49) v1(195.78,33.86) v1(195.78,33.22) v1(195.78,32.59) v1(196.42,35.76) v1(196.42,35.13) v1(196.42,34.49) v1(196.42,33.86) v1(196.42,33.22) v1(196.42,32.59) v1(197.41,35.74) v1(197.41,35.1) v1(197.41,34.47) v1(197.41,33.83) v1(197.41,33.2) v1(197.41,32.56) v1(198.04,35.74) v1(198.04,35.1) v1(198.04,34.47) v1(198.04,33.83) v1(198.04,33.2) v1(198.04,32.56) v1(198.32,19.51) v1(198.32,18.87) v1(198.32,18.24) v1(198.32,17.37) v1(198.32,16.74) v1(198.32,16.1) v1(198.3,15.11) v1(198.3,14.48) v1(198.3,13.84) v1(198.29,12.89) v1(198.29,12.26) v1(198.29,11.62) v1(198.68,35.74) v1(198.68,35.1) v1(198.68,34.47) v1(198.68,33.83) v1(198.68,33.2) v1(198.68,32.56) v1(198.93,15.11) v1(198.93,14.48) v1(198.93,13.84) v1(198.92,12.89) v1(198.92,12.26) v1(198.92,11.62) v1(198.96,19.51) v1(198.96,18.87) v1(198.96,18.24) v1(198.96,17.37) v1(198.96,16.74) v1(198.96,16.1) v1(199.63,35.73) v1(199.63,35.09) v1(199.63,34.46) v1(199.63,33.82) v1(199.63,33.19) v1(199.63,32.55) v1(199.59,19.51) v1(199.59,18.87) v1(199.59,18.24) v1(199.59,17.37) v1(199.59,16.74) v1(199.59,16.1) v1(199.57,15.11) v1(199.57,14.48) v1(199.57,13.84) v1(199.56,12.89) v1(199.56,12.26) v1(199.56,11.62) v1(200.23,19.51) v1(200.23,18.87) v1(200.23,18.24) v1(200.23,17.37) v1(200.23,16.74) v1(200.23,16.1) v1(200.2,15.11) v1(200.2,14.48) v1(200.2,13.84) v1(200.19,12.89) v1(200.19,12.26) v1(200.19,11.62) v1(200.27,35.73) v1(200.27,35.09) v1(200.27,34.46) v1(200.27,33.82) v1(200.27,33.19) v1(200.27,32.55) v1(200.84,15.11) v1(200.84,14.48) v1(200.84,13.84) v1(200.83,12.89) v1(200.83,12.26) v1(200.83,11.62) v1(200.9,35.73) v1(200.9,35.09) v1(200.9,34.46) v1(200.9,33.82) v1(200.9,33.19) v1(200.9,32.55) v1(200.86,19.51) v1(200.86,18.87) v1(200.86,18.24) v1(200.86,17.37) v1(200.86,16.74) v1(200.86,16.1) v1(201.5,19.51) v1(201.5,18.87) v1(201.5,18.24) v1(201.5,17.37) v1(201.5,16.74) v1(201.5,16.1) v1(201.47,15.11) v1(201.47,14.48) v1(201.47,13.84) v1(201.46,12.89) v1(201.46,12.26) v1(201.46,11.62) v1(201.63,130.15)
GND_SIGNAL: length 145
  GND2 w0.635: v1(204.27,33.06) 203.7,32.49 203.7,28.04 196.19,20.54 180.81,20.54 176.38,16.1 149.31,16.1 147.61,14.4 118.5,14.4 ; v1(118.5,16.68) 118.5,14.4 ; 118.5,14.4 v1(118.5,6.72) v1(115.96,6.72) 101.99,6.72 v1(99.32,9.39)
  BOTTOM w0.127: J25.14 v1(118.5,16.68) ; J25.29 v1(115.96,6.72) ; J25.27 v1(118.5,6.72) ; J25.40 v1(99.32,9.39)
  BOTTOM w0.635: J25.40 J25.39 ; v1(204.27,33.06) L2.1 ; J25.27 J25.14
CS0: length 584.7
  TOP w0.203: J4.7 111.76,20.02 109.96,18.21 97.18,18.21 97.17,18.2 83.58,18.2 82.59,17.21 82.59,8.71 81.5,7.62 76.01,7.62 74.24,5.85 v1(66.7,5.85) ; v1(184.74,70.7) 197.1,92.11 197.1,92.11 v1(197.1,111.76) 197.1,112.29 197.09,112.31 197.09,136.52 v1(187.28,153.5) 177.08,171.17 171.13,177.12 171.1,177.12 v1(157.9,184.74) 136.47,197.1 v1(116.84,197.1) 92.11,197.1 v1(75.1,187.28) 57.43,177.08 57.43,177.05 51.48,171.1 v1(43.86,157.9) 31.5,136.49 31.5,136.49 v1(31.5,116.84) 31.5,92.11 v1(41.32,75.1) 51.52,57.43 57.47,51.48 57.5,51.48 v1(70.7,43.86) 90.55,32.4 92.11,31.5 v1(111.76,31.5) 136.49,31.5 136.49,31.5 v1(153.5,41.32)
  LAYER 1 w0.203: J17.7 v1(43.86,157.9) ; J4.7 v1(111.76,31.5) ; J2.7 v1(184.74,70.7) ; J1.7 v1(70.7,43.86) ; J7.7 v1(157.9,184.74) ; J6.7 v1(75.1,187.28) ; J19.7 v1(116.84,197.1) ; J10.7 v1(41.32,75.1) ; J3.7 v1(187.28,153.5) ; J9.7 v1(197.1,111.76) ; J8.7 v1(153.5,41.32) ; J5.7 v1(31.5,116.84)
  BOTTOM w0.127: RN2.1 v1(66.7,5.85)
CS1: length 580.5
  TOP w0.203: v1(184.91,73.53) 195.63,92.1 195.83,92.3 v1(195.83,114.3) 195.83,114.83 195.85,114.85 195.85,136.11 v1(184.91,155.07) 175.91,170.66 170.59,175.97 170.54,175.97 170.48,176.01 155.07,184.91 v1(155.07,184.91) 136.15,195.83 136.15,195.83 v1(114.3,195.83) 92.41,195.83 92.34,195.77 v1(73.53,184.91) 57.94,175.91 52.58,170.55 52.58,170.46 v1(43.69,155.07) 32.77,136.15 v1(32.77,114.3) 32.77,92.45 32.77,92.45 v1(43.69,73.53) 52.69,57.94 58.05,52.58 58.14,52.58 v1(73.53,43.69) 92.45,32.77 v1(114.3,32.77) 136.19,32.77 136.26,32.83 v1(155.07,43.69) ; J4.8 114.3,28 114.16,27.86 114.16,12.59 115.14,11.61 125.42,11.61 127.41,9.62 127.41,8.68 130.48,5.6 141.57,5.6 142.75,6.78 142.75,8.04 141.64,9.15 v1(139.9,9.15)
  LAYER 1 w0.203: J3.8 v1(184.91,155.07) ; J6.8 v1(73.53,184.91) ; J5.8 v1(32.77,114.3) ; J10.8 v1(43.69,73.53) ; J7.8 v1(155.07,184.91) ; J8.8 v1(155.07,43.69) ; J2.8 v1(184.91,73.53) ; J4.8 v1(114.3,32.77) ; J17.8 v1(43.69,155.07) ; J9.8 v1(195.83,114.3) ; J19.8 v1(114.3,195.83) ; J1.8 v1(73.53,43.69)
  BOTTOM w0.203: RN5.3 v1(139.9,9.15)
CS2: length 581.8
  TOP w0.203: v1(156.63,46.06) 135.81,34.04 v1(116.84,34.04) 92.79,34.04 v1(76.37,43.52) 58.77,53.68 58.72,53.68 53.74,58.66 v1(46.06,71.97) 34.03,92.81 34.02,92.82 34.02,111.21 34.04,111.23 v1(34.04,111.76) 34.04,135.81 v1(43.52,152.23) 53.68,169.83 53.68,169.88 58.66,174.86 v1(71.97,182.54) 92.79,194.56 v1(111.76,194.56) 112.29,194.56 112.32,194.54 135.85,194.54 v1(152.23,185.08) 169.83,174.92 169.88,174.89 169.9,174.89 174.86,169.94 v1(182.54,156.63) 194.58,135.78 194.59,135.77 194.59,117.4 194.56,117.37 v1(194.56,116.84) 194.56,92.58 194.28,92.3 v1(185.08,76.37) ; v1(140.46,8.5) 141.11,8.5 141.54,8.06 141.54,7.37 140.8,6.63 135.65,6.63 134.39,7.89 134.39,12.56 133.62,13.33 118.06,13.33 116.7,14.69 116.7,27.86 116.84,28 J4.9
  LAYER 1 w0.203: J2.9 v1(185.08,76.37) ; J17.9 v1(43.52,152.23) ; J7.9 v1(152.23,185.08) ; J10.9 v1(46.06,71.97) ; J6.9 v1(71.97,182.54) ; J5.9 v1(34.04,111.76) ; J4.9 v1(116.84,34.04) ; J3.9 v1(182.54,156.63) ; J9.9 v1(194.56,116.84) ; J1.9 v1(76.37,43.52) ; J19.9 v1(111.76,194.56) ; J8.9 v1(156.63,46.06)
  BOTTOM w0.203: RN5.2 v1(140.46,8.5)
CS3: length 582.8
  TOP w0.203: v1(158.2,48.43) 135.52,35.34 135.49,35.31 v1(119.38,35.31) 93.13,35.31 v1(79.2,43.35) 59.36,54.81 59.36,54.82 54.79,59.38 v1(48.43,70.4) 35.31,93.14 v1(35.31,109.22) 35.31,135.47 35.31,135.47 v1(43.35,149.4) 54.81,169.24 59.37,173.81 59.38,173.81 v1(70.4,180.17) 93.13,193.29 93.13,193.29 v1(109.22,193.29) 135.46,193.29 v1(149.4,185.25) 169.24,173.79 173.81,169.23 173.81,169.22 v1(180.17,158.2) 193.35,135.36 193.36,135.36 193.36,119.98 193.29,119.91 v1(193.29,119.38) 193.29,93.12 193.27,93.09 v1(185.25,79.2) ; v1(139.9,7.85) 136,7.85 135.28,8.57 135.28,13.31 134.23,14.36 120.38,14.36 119.15,15.6 119.15,27.77 119.38,28 J4.10
  LAYER 1 w0.203: J5.10 v1(35.31,109.22) ; J7.10 v1(149.4,185.25) ; J2.10 v1(185.25,79.2) ; J3.10 v1(180.17,158.2) ; J10.10 v1(48.43,70.4) ; J4.10 v1(119.38,35.31) ; J19.10 v1(109.22,193.29) ; J8.10 v1(158.2,48.43) ; J17.10 v1(43.35,149.4) ; J6.10 v1(70.4,180.17) ; J1.10 v1(79.2,43.35) ; J9.10 v1(193.29,119.38)
  BOTTOM w0.203: RN5.1 v1(139.9,7.85)
CS4: length 652.8
  TOP w0.203: v1(185.42,82.04) 191.81,93.11 192.02,93.32 v1(192.02,121.92) 192.02,135.11 v1(177.8,159.76) 172.68,168.63 168.61,172.69 168.61,172.69 v1(146.56,185.42) 135.13,192.02 135.13,192.02 v1(106.68,192.02) 93.47,192.02 93.47,192.02 v1(68.84,177.8) 59.97,172.68 55.91,168.61 55.91,168.61 v1(43.18,146.56) 36.58,135.12 v1(36.58,106.68) 36.58,93.48 v1(50.8,68.84) 55.92,59.97 59.99,55.91 59.99,55.91 v1(82.04,43.18) 93.47,36.58 v1(121.92,36.58) 135.13,36.58 135.14,36.58 v1(159.76,50.8)
  LAYER 1 w0.203: 36.61,150.36 v1(43.18,146.56) ; J4.11 v1(121.92,36.58) ; J8.11 v1(159.76,50.8) ; J3.11 v1(177.8,159.76) ; J6.11 v1(68.84,177.8) ; J19.11 v1(106.68,192.02) ; J10.11 v1(50.8,68.84) ; J5.11 v1(36.58,106.68) ; 150.36,191.99 v1(146.56,185.42) ; 78.24,36.61 v1(82.04,43.18) ; 191.99,78.24 v1(185.42,82.04) ; J9.11 v1(192.02,121.92)
  BOTTOM w0.127: RN1.2 v1(46.06,5.85)
  BOTTOM w0.203: J4.11 120.22,30.7 109.37,30.7 108.18,29.5 108.18,27.71 106.21,25.74 106.21,21.32 103.37,18.48 92.2,18.48 91.44,17.72 91.44,2.75 90.47,1.78 52.73,1.78 51.96,2.56 51.96,5.18 51.29,5.85 RN1.2
CS5: length 662.3
  TOP w0.203: v1(161.33,53.17) 134.79,37.85 134.79,37.85 v1(124.46,37.85) 93.82,37.85 v1(84.87,43.01) 60.65,56.99 60.61,56.99 57.06,60.54 v1(53.17,67.27) 37.87,93.78 37.86,93.78 37.86,103.59 37.85,103.61 v1(37.85,104.14) 37.85,134.79 37.85,134.79 v1(43.01,143.73) 56.99,167.95 56.99,167.99 60.54,171.54 v1(67.27,175.43) 93.78,190.73 93.79,190.74 103.59,190.74 103.61,190.75 v1(104.14,190.75) 134.83,190.75 134.88,190.7 v1(143.73,185.59) 167.95,171.61 167.97,171.59 168.01,171.59 171.54,168.06 v1(175.43,161.33) 190.75,134.78 v1(190.75,124.46) 190.75,93.8 190.74,93.78 v1(185.59,84.87)
  LAYER 1 w0.203: 148.16,193.26 v1(143.73,185.59) ; 183.1,165.75 v1(175.43,161.33) ; J4.12 v1(124.46,37.85) ; 45.5,62.85 v1(53.17,67.27) ; J19.12 v1(104.14,190.75) ; 193.26,80.44 v1(185.59,84.87) ; J9.12 v1(190.75,124.46) ; J5.12 v1(37.85,104.14) ; 62.85,183.1 v1(67.27,175.43) ; 35.34,148.16 v1(43.01,143.73) ; 80.44,35.34 v1(84.87,43.01) ; 165.75,45.5 v1(161.33,53.17)
  BOTTOM w0.127: RN1.1 v1(45.11,5.2)
  BOTTOM w0.203: J4.12 122.57,27.1 110.9,27.1 110.25,26.45 110.25,21.34 109.33,20.42 106.73,20.42 103.81,17.5 92.79,17.5 92.15,16.87 92.15,2.03 91.12,1 52.11,1 51.31,1.8 51.31,4.38 50.49,5.2 RN1.1
CS6: length 590.4
  TOP w0.203: v1(185.76,87.71) 189.32,93.87 189.48,94.03 v1(189.48,127) 189.48,134.44 v1(173.06,162.89) 170.48,167.36 167.34,170.49 167.34,170.49 v1(140.89,185.76) 134.5,189.45 134.47,189.48 v1(101.6,189.48) 94.16,189.48 v1(65.71,173.06) 61.24,170.48 58.11,167.34 58.11,167.34 v1(42.84,140.89) 39.12,134.44 v1(39.12,101.6) 39.12,94.15 39.12,94.15 v1(55.54,65.71) 58.12,61.24 61.26,58.11 61.26,58.11 v1(87.71,42.84) 94.03,39.19 94.1,39.12 v1(127,39.12) 127.53,39.12 127.55,39.1 134.42,39.1 v1(162.89,55.54) ; 167.95,46.77 168.78,45.94 168.78,31.51 170.21,30.09 v1(177.04,30.09)
  LAYER 1 w0.203: 167.95,46.77 v1(162.89,55.54) ; J1.13 v1(87.71,42.84) ; J17.13 v1(42.84,140.89) ; 46.77,60.65 v1(55.54,65.71) ; J7.13 v1(140.89,185.76) ; 181.83,167.95 v1(173.06,162.89) ; J2.13 v1(185.76,87.71) ; J19.13 v1(101.6,189.48) ; J9.13 v1(189.48,127) ; 60.65,181.83 v1(65.71,173.06) ; J4.13 v1(127,39.12) ; J5.13 v1(39.12,101.6)
  BOTTOM w0.203: RN4.2 v1(177.04,30.09)
CS7: length 595
  TOP w0.203: J8.14 171.91,46.29 171.91,32.05 173.23,30.74 v1(176.44,30.74) ; v1(185.93,90.54) 188.03,94.18 188.21,94.36 v1(188.21,129.54) 188.21,134.1 v1(170.69,164.45) 169.36,166.76 169.33,166.76 166.7,169.4 v1(138.06,185.93) 134.11,188.21 134.11,188.21 v1(99.06,188.21) 94.49,188.21 94.49,188.21 v1(64.15,170.69) 61.84,169.36 59.2,166.73 59.2,166.7 v1(42.67,138.06) 40.39,134.1 v1(40.39,99.06) 40.39,94.5 v1(57.91,64.15) 59.24,61.84 61.87,59.2 61.9,59.2 v1(90.54,42.67) 94.5,40.39 v1(129.54,40.39) 130.07,40.39 130.09,40.4 134.13,40.4 134.13,40.4 v1(164.45,57.91)
  LAYER 1 w0.203: J3.14 v1(170.69,164.45) ; J7.14 v1(138.06,185.93) ; J10.14 v1(57.91,64.15) ; J1.14 v1(90.54,42.67) ; J2.14 v1(185.93,90.54) ; J4.14 v1(129.54,40.39) ; J6.14 v1(64.15,170.69) ; J17.14 v1(42.67,138.06) ; J8.14 v1(164.45,57.91) ; J5.14 v1(40.39,99.06) ; J19.14 v1(99.06,188.21) ; J9.14 v1(188.21,129.54)
  BOTTOM w0.203: RN4.1 v1(176.44,30.74)
CS_IN_0: length 27.2
  TOP w0.203: v1(86.91,6.53) 99.41,6.53 v1(101.4,4.55)
  BOTTOM w0.203: U3.10 v1(86.91,6.53) ; J25.37 105.8,7.1 105,6.3 101.77,6.3 101.4,5.93 v1(101.4,4.55) R60.1
CS_IN_1: length 77.9
  LAYER 1 w0.203: v1(103.44,4.53) 106.83,1.14 159.4,1.14 160.59,2.34 160.59,8.85 159.72,9.73 v1(159.01,9.73)
  BOTTOM w0.203: J25.36 107.07,6.83 106.12,5.88 103.82,5.88 103.44,5.5 v1(103.44,4.53) R59.1 ; U5.8 v1(159.01,9.73)
CS_IN_2: length 72.3
  LAYER 1 w0.203: v1(158.42,9.08) 159.17,9.08 160.01,8.24 160.01,2.93 158.92,1.84 108.19,1.84 v1(105.5,4.53)
  BOTTOM w0.203: R58.1 v1(105.5,4.53) 105.5,5.18 105.82,5.5 107.29,5.5 108.34,6.55 J25.35 ; U5.9 v1(158.42,9.08)
CS_IN_3: length 66.2
  LAYER 1 w0.203: v1(159.01,8.43) 159.01,3.4 158.04,2.43 109.68,2.43 v1(107.57,4.53)
  BOTTOM w0.203: R57.1 v1(107.57,4.53) 109.61,6.58 J25.34 ; U5.10 v1(159.01,8.43)
CS_IN_4: length 64.3
  LAYER 1 w0.203: v1(109.63,4.52) 108.67,5.47 98.31,5.47 97.65,4.82 97.65,2.71 96.82,1.88 85.53,1.88 84.58,2.83 61.52,2.83 60.61,3.74 v1(60.61,6.52)
  BOTTOM w0.203: J25.33 110.88,5.78 v1(109.63,4.52) R22.1 ; U1.9 v1(60.61,6.52)
CS_IN_5: length 63.2
  LAYER 1 w0.203: v1(61.44,5.87) 62.44,5.87 63.12,5.19 63.12,4.58 64.05,3.66 85.05,3.66 86.22,2.49 90.27,2.49 90.87,3.09 90.87,5.56 91.61,6.3 109.89,6.3 v1(111.67,4.52)
  BOTTOM w0.203: J25.32 112.15,5 v1(111.67,4.52) R21.1 ; U1.10 v1(61.44,5.87)
CS_IN_6: length 82.9
  TOP w0.203: v1(113.72,4.51) 116.22,2.01 134.28,2.01 135.67,3.4 v1(135.67,4.11)
  BOTTOM w0.203: J25.31 113.34,9.3 113.34,4.89 v1(113.72,4.51) R30.1 ; v1(158.28,29.43) U4.9 160.4,29.43 161.18,28.66 161.18,5.4 159.89,4.11 v1(135.67,4.11)
CS_IN_7: length 83.1
  TOP w0.203: v1(115.77,4.5) 117.44,2.83 133.32,2.83 v1(133.88,3.39)
  BOTTOM w0.203: v1(133.88,3.39) 160.77,3.39 161.98,4.6 161.98,29.01 160.9,30.08 U4.10 v1(157.69,30.08) ; J25.30 114.69,5.58 v1(115.77,4.5) R29.1
EXT_INT: length 736.1
  LAYER 1 w0.203: J19.15 96.52,202.84 93.9,205.46 ; 64.37,28.46 v1(64.37,21.1) ; 64.37,28.46 62.41,30.43 51.27,30.43 49.31,32.39 J10.15 46.47,53.4 25.64,53.4 22.07,56.97 22.07,96.52 25.52,96.52 ; 64.37,28.46 66.67,30.76 86.27,30.76 J1.15 87.04,25.89 88.19,24.74 130.94,24.74 132.08,25.88 J4.15 133.93,27.14 153.86,27.14 155.3,28.58 155.3,36.87 156.25,37.82 170.43,37.82 172.47,39.85 172.47,47.98 172.1,48.35 J8.15 185.61,49.31 187.73,51.43 197.14,51.43 198.84,53.14 198.84,85.27 J2.15 206.43,87.04 207.62,88.24 207.62,130.19 205.72,132.08 ; J9.15 205.72,132.08 ; 205.72,132.08 207.62,133.97 207.62,170.94 ; J6.15 56.25,201.47 60.24,205.46 93.9,205.46 ; 207.62,170.94 205.71,172.85 180.15,172.85 J3.15 ; 207.62,170.94 207.62,187.38 197.93,197.07 J7.15 140.61,198.01 140.61,205.35 139.06,206.9 95.34,206.9 93.9,205.46 ; J17.15 21.52,141.56 20.1,140.14 20.1,123.76 20.8,123.06 25.51,123.06 27.17,121.41 27.17,99.64 25.46,97.93 25.46,96.58 25.52,96.52 ; 25.52,96.52 J5.15
  BOTTOM w0.203: v1(66.89,18.37) Q3.2 66.15,19.72 66.13,19.75 R20.2 v1(64.37,21.1)
EXT_INT_IN: length 34.1
  LAYER 1 w0.203: v1(87.4,15.08) v1(98.02,15.08)
  BOTTOM w0.127: J25.1 v1(101.99,16.68)
  BOTTOM w0.203: v1(87.4,15.08) v1(72.61,15.08) R17.1 ; v1(101.99,16.68) 101.61,16.29 101.53,16.29 101.4,16.16 101.4,16.08 100.39,15.08 v1(98.02,15.08)
MISO_0: length 120.1
  BOTTOM w0.203: R1.1 111.21,22.69 R44.1 111.19,22.82 111.9,23.53 112.05,23.53 112.89,24.37 140.77,24.37 142.47,22.67 151.75,22.67 152.53,23.44 152.53,31.13 152.9,31.5 156.5,31.5 158.85,33.85 167.6,33.85 169.41,35.65 169.41,41.45 171.23,43.28 204.58,43.28 205.12,43.81 205.12,47.19 205.77,47.84 U6.7
MISO_1: length 134.5
  BOTTOM w0.203: R2.1 67.26,39.32 65.52,38.86 65.52,38.81 64.55,38.55 64.48,38.42 63.47,39 5.75,39 4.13,40.63 4.13,108.55 4.7,109.12 U2.3
MISO_2: length 68.1
  BOTTOM w0.203: U2.4 7.7,109.77 8.57,108.9 8.57,71.96 9.59,70.94 33.05,70.94 R42.1 34.11,71.5 34.15,71.54 R3.1
MISO_3: length 24.1
  BOTTOM w0.203: U2.5 9.42,110.42 10.27,111.28 10.27,115.83 10.8,116.36 21.17,116.36 21.32,116.51 21.32,116.66 22.04,117.38 R41.1 22.3,117.38 22.34,117.41 R4.1
MISO_4: length 84.9
  BOTTOM w0.203: U2.6 9.08,111.07 9.52,111.52 9.52,162.36 10.39,163.22 35.34,163.22 R40.1 37.97,161.7 37.97,161.6 39.02,161
